# EAGLE board 14138-QwiicHUD-Panel (EAGLE 9.1.0), part 1 of 4
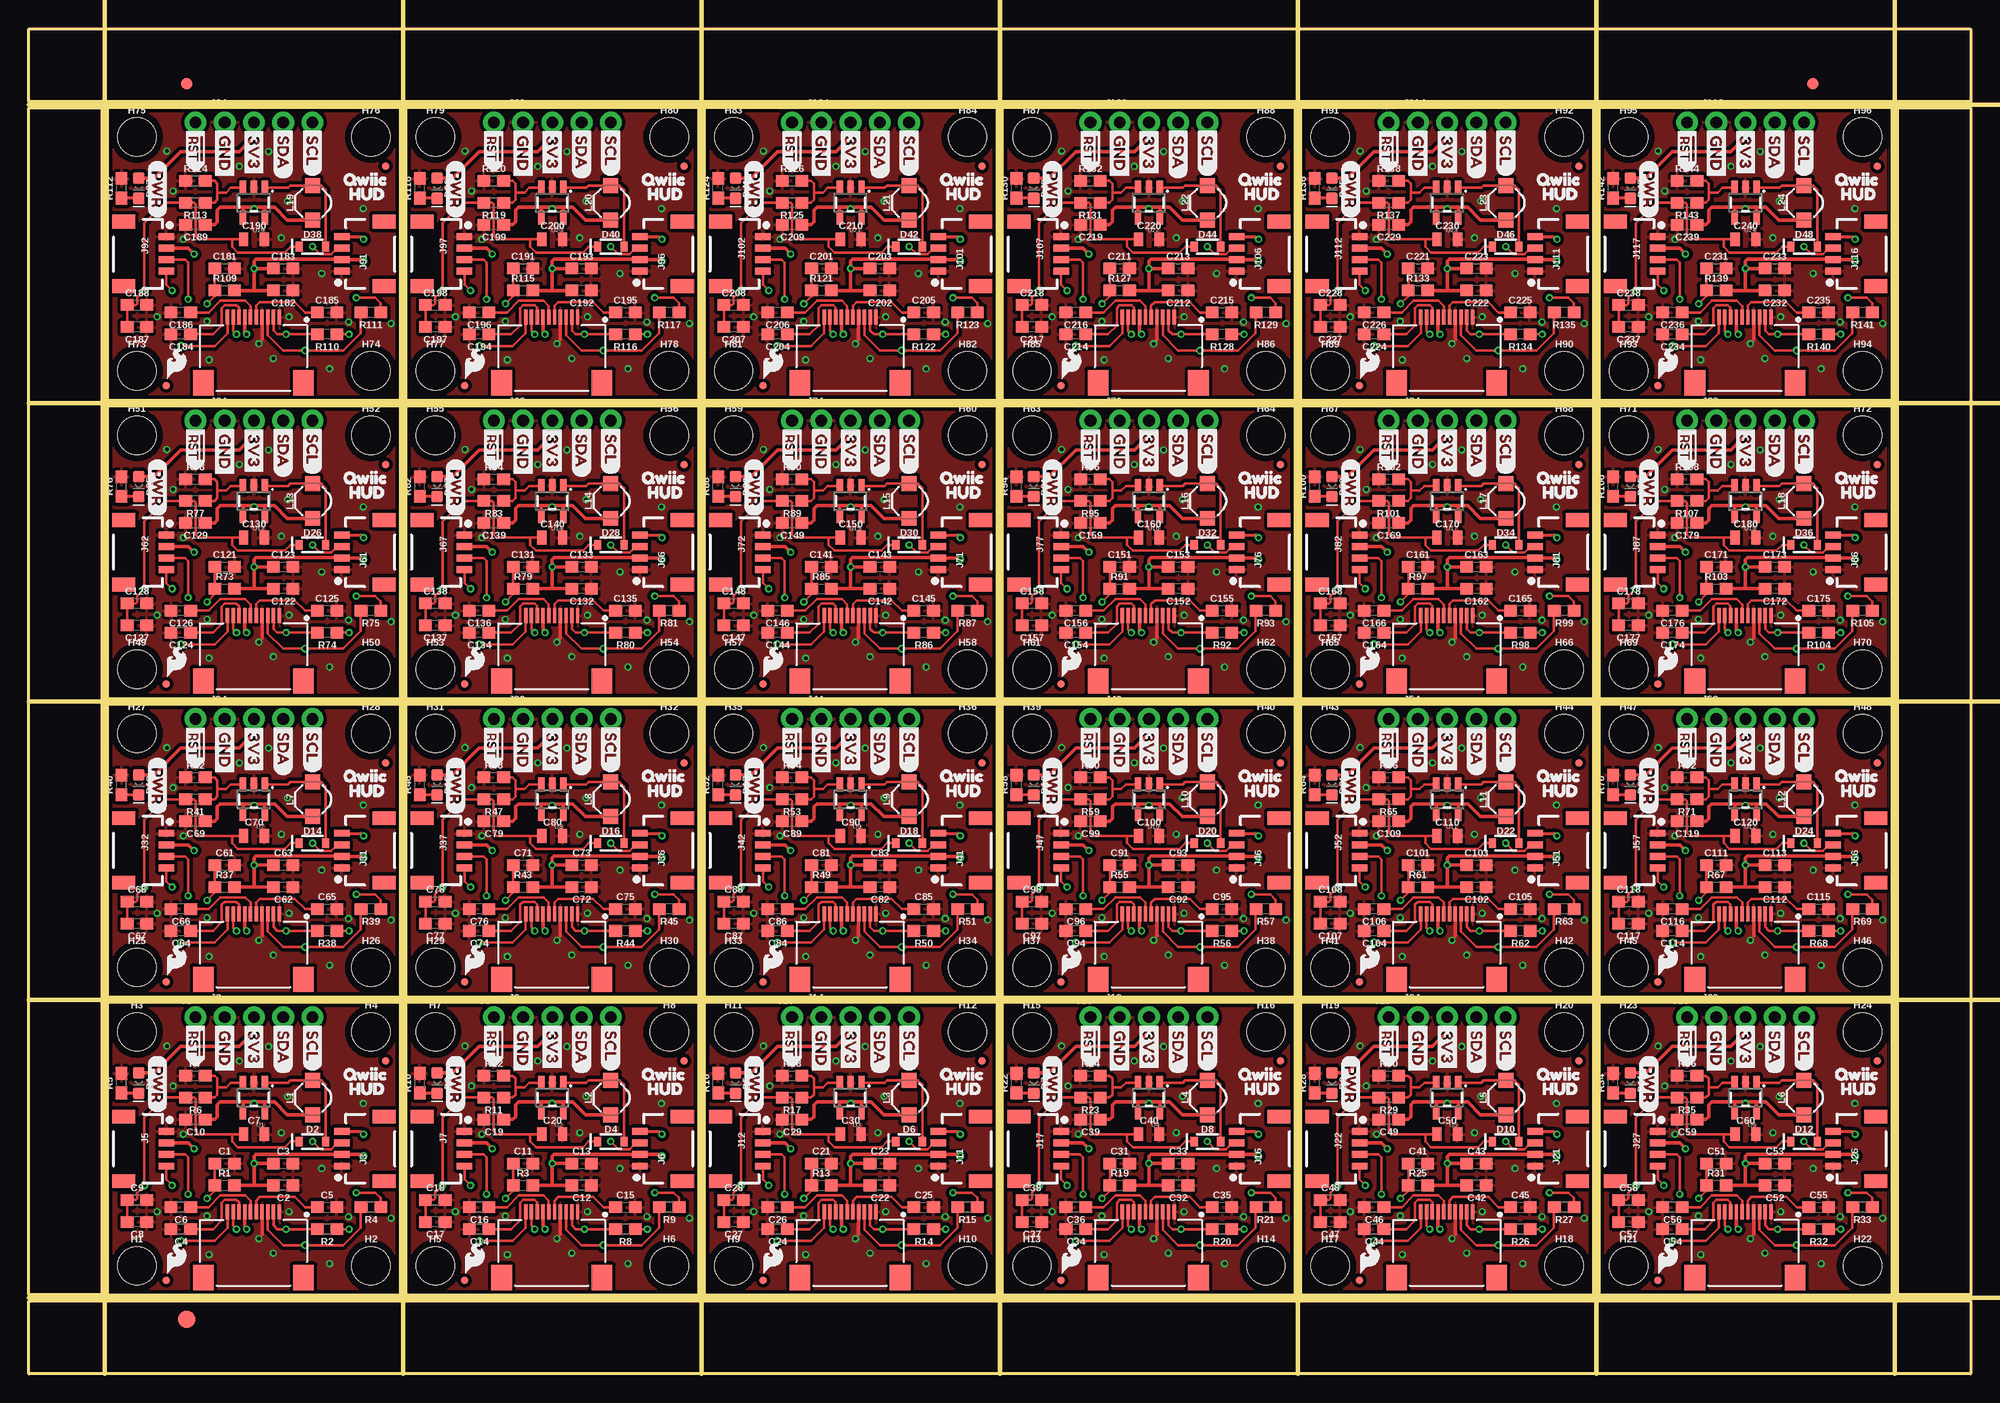
[diagram p0: board, top side]
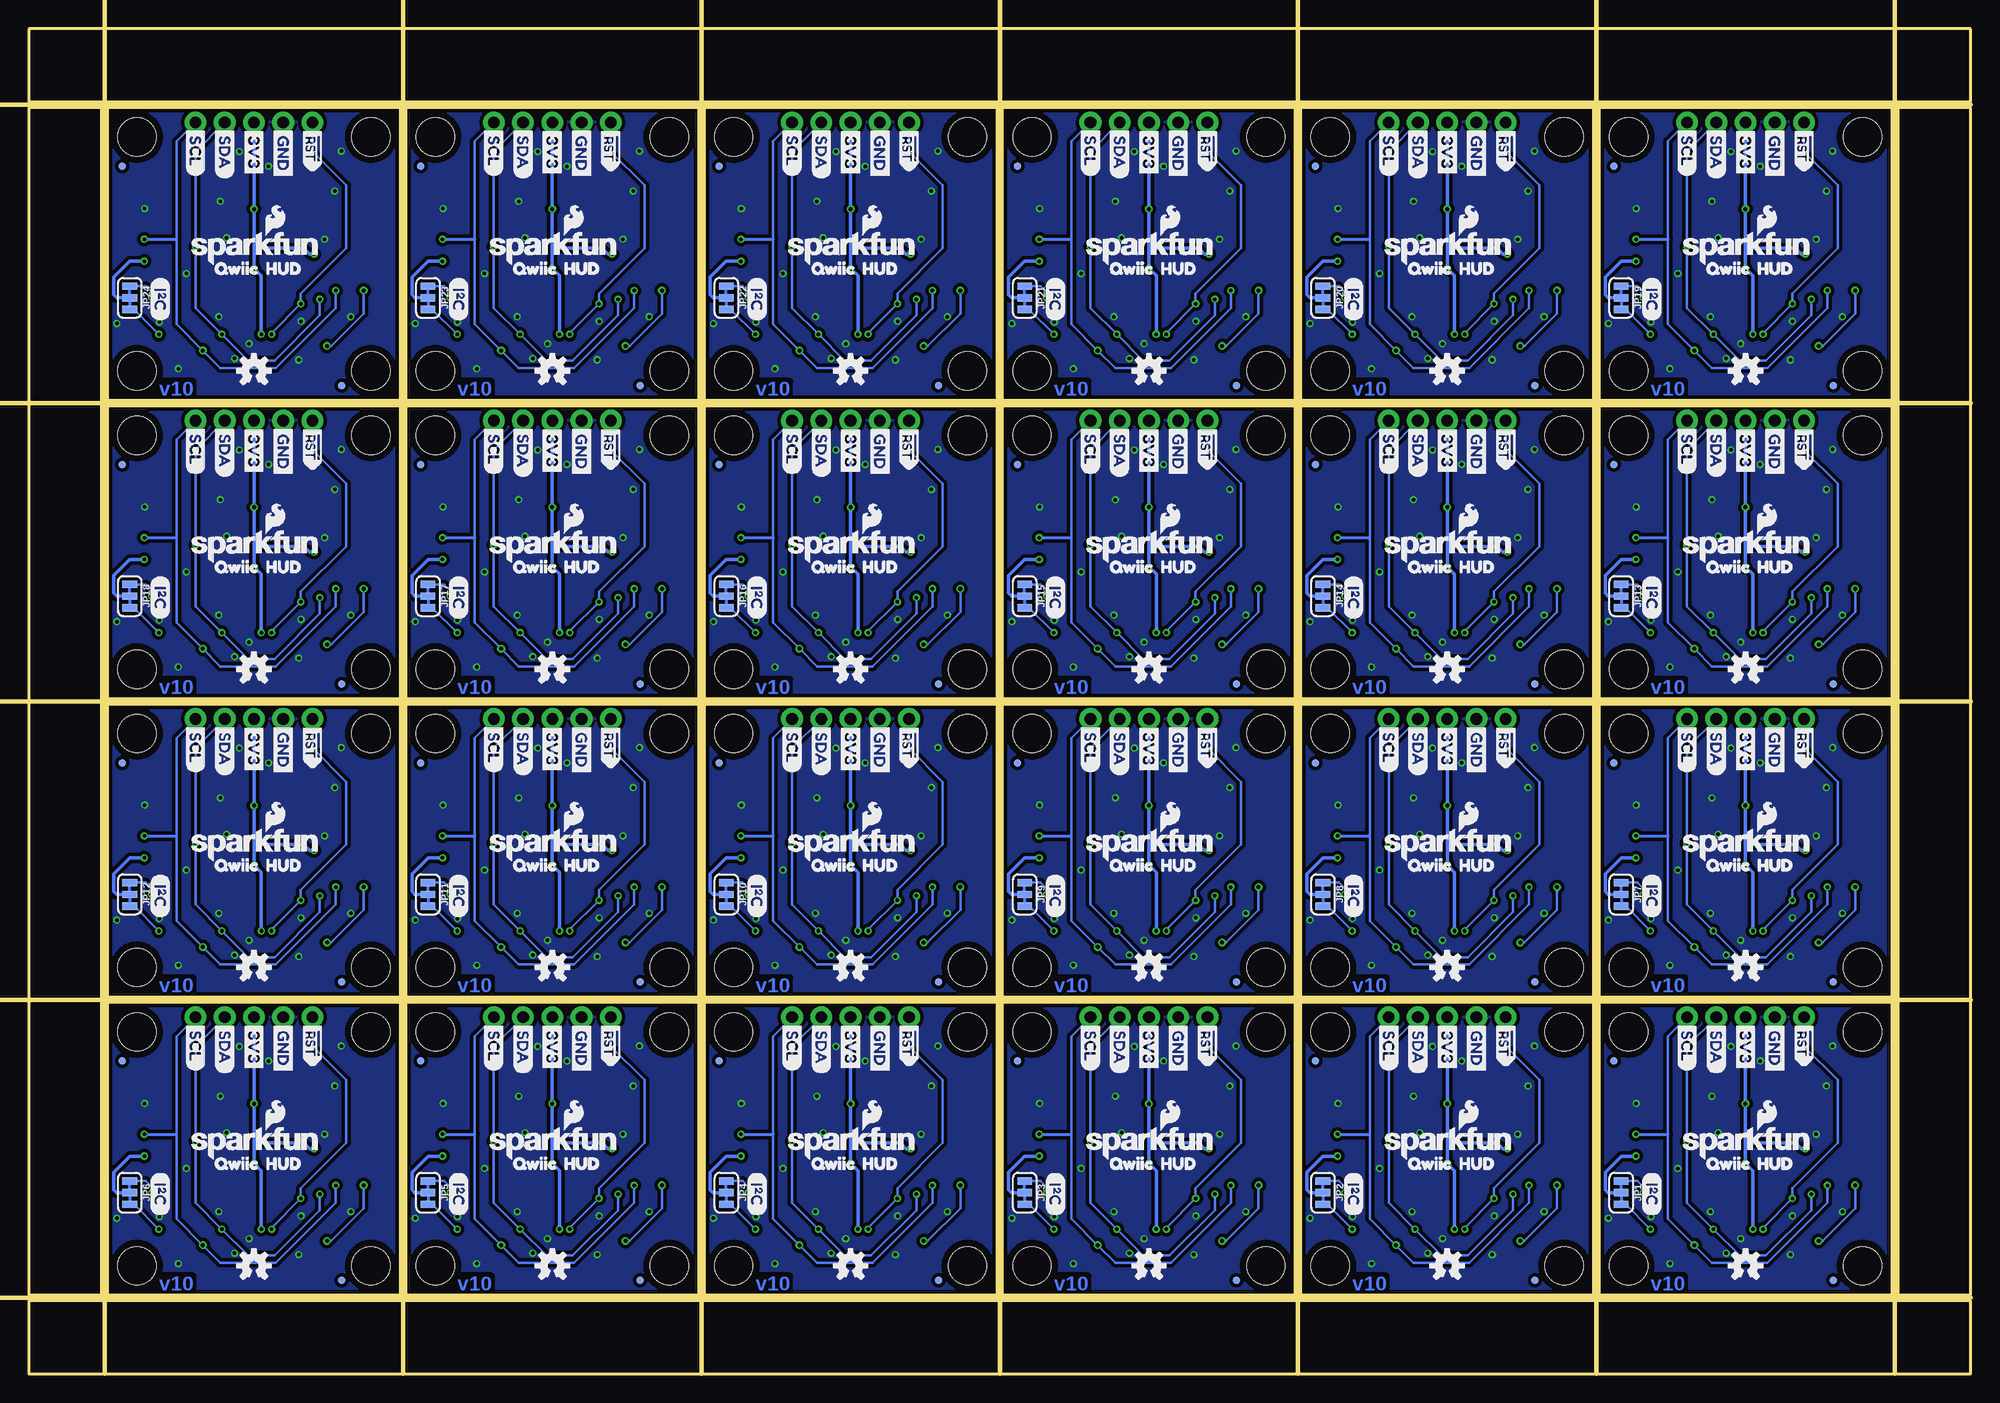
[diagram p1: board, bottom side, seen from below]

Size 168.66 x 116.84 mm. Coordinates in mm from the lower left corner, seen from the top.
Outline: 6.86,32.26 32.26,32.26 32.26,6.86 6.86,6.86 6.86,32.26
Outline: 32.77,32.26 58.17,32.26 58.17,6.86 32.77,6.86 32.77,32.26
Outline: 58.67,32.26 84.07,32.26 84.07,6.86 58.67,6.86 58.67,32.26
Outline: 84.58,32.26 109.98,32.26 109.98,6.86 84.58,6.86 84.58,32.26
Outline: 110.49,32.26 135.89,32.26 135.89,6.86 110.49,6.86 110.49,32.26
Outline: 136.4,32.26 161.8,32.26 161.8,6.86 136.4,6.86 136.4,32.26
Outline: 6.86,58.17 32.26,58.17 32.26,32.77 6.86,32.77 6.86,58.17
Outline: 32.77,58.17 58.17,58.17 58.17,32.77 32.77,32.77 32.77,58.17
Outline: 58.67,58.17 84.07,58.17 84.07,32.77 58.67,32.77 58.67,58.17
Outline: 84.58,58.17 109.98,58.17 109.98,32.77 84.58,32.77 84.58,58.17
Outline: 110.49,58.17 135.89,58.17 135.89,32.77 110.49,32.77 110.49,58.17
Outline: 136.4,58.17 161.8,58.17 161.8,32.77 136.4,32.77 136.4,58.17
Outline: 6.86,84.07 32.26,84.07 32.26,58.67 6.86,58.67 6.86,84.07
Outline: 32.77,84.07 58.17,84.07 58.17,58.67 32.77,58.67 32.77,84.07
Outline: 58.67,84.07 84.07,84.07 84.07,58.67 58.67,58.67 58.67,84.07
Outline: 84.58,84.07 109.98,84.07 109.98,58.67 84.58,58.67 84.58,84.07
Outline: 110.49,84.07 135.89,84.07 135.89,58.67 110.49,58.67 110.49,84.07
Outline: 136.4,84.07 161.8,84.07 161.8,58.67 136.4,58.67 136.4,84.07
Outline: 6.86,109.98 32.26,109.98 32.26,84.58 6.86,84.58 6.86,109.98
Outline: 32.77,109.98 58.17,109.98 58.17,84.58 32.77,84.58 32.77,109.98
Outline: 58.67,109.98 84.07,109.98 84.07,84.58 58.67,84.58 58.67,109.98
Outline: 84.58,109.98 109.98,109.98 109.98,84.58 84.58,84.58 84.58,109.98
Outline: 110.49,109.98 135.89,109.98 135.89,84.58 110.49,84.58 110.49,109.98
Outline: 136.4,109.98 161.8,109.98 161.8,84.58 136.4,84.58 136.4,109.98
Outline: 0,6.35 168.66,6.35 168.66,0 0,0 0,6.35
Outline: 162.31,109.98 168.66,109.98 168.66,6.86 162.31,6.86 162.31,109.98
Outline: 0,116.84 168.66,116.84 168.66,110.49 0,110.49 0,116.84
Outline: 0,109.98 6.35,109.98 6.35,6.86 0,6.86 0,109.98
Copper layers (1*16): Top 0.035mm / dielectric 1.5mm / Bottom 0.035mm
Design rules "SparkFun-2-layer-PCBWay-LIMIT": minimum track width 6mil, minimum drill 0.3mm, track to track 6mil, track to pad 6mil, pad to pad 6mil, via to via 6mil, smd to smd 6mil, copper to edge 6mil, drill to drill 6mil, minimum pad ring 6mil, minimum via ring 6mil, stop-mask expansion 4mil, vias tented up to drill 25mil, thermal gap 10mil
Milling: 12 lines

## Footprints (pad centres in the part's own frame; a part is rotated, then mirrored left to right if it is on the bottom)
0603 = smd 1.1 x 1: 1 -0.85,0; 2 0.85,0
0805 = smd 0.8 x 1.2: 1 -0.9,0; 2 0.9,0
LED-0603 = smd 1 x 1: A -0.877,0; C 0.877,0
SOD-323 = smd 0.63 x 0.83: A 1.15,0; C -1.15,0
FIDUCIAL-1X2 = smd 1 x 1: 1 0,0
FIDUCIAL-1.5X3 = smd 1.5 x 1.5: 1 0,0
FIDUCIAL-MICRO = smd 0.635 x 0.635: 1 0,0
STAND-OFF = hole 3.302: 0,0
1X01_NO_SILK = drill 1.016 pad 1.88: 1 0,0
1X04_NO_SILK = drill 1.016 pad 1.88: 1 0,0; 2 2.54,0; 3 5.08,0; 4 7.62,0
1X04_1MM_RA = smd 0.6 x 1.35: 1 -1.5,0; 2 -0.5,0; 3 0.5,0; 4 1.5,0 | smd 1.2 x 2: NC1 2.8,-3.675; NC2 -2.8,-3.675
SERIES6288 = smd 0.3 x 1.3: 1 -2.3,3.4; 2 -1.8,3.4; 3 -1.3,3.4; 4 -0.8,3.4; 5 -0.3,3.4; 6 0.2,3.4; 7 0.7,3.4; 8 1.2,3.4; 9 1.7,3.4; 10 2.2,3.4 | smd 1.8 x 2.2: NC1 -4.4,-2.3; NC2 4.3,-2.3
SMT-JUMPER_3_2-NC_TRACE_SILK = smd 0.635 x 1.27: 1 -1.016,0; 2 0,0; 3 1.016,0
INDUCTOR_4.7UH = smd 1.3 x 1.3: P$1 -1.5,0; P$2 1.5,0
SOT23-5 = smd 0.55 x 1.2: 1 -0.95,-1.3; 2 0,-1.3; 3 0.95,-1.3; 4 0.95,1.3; 5 -0.95,1.3

## Placement (x,y rotation side)
C1  2.2uF  [0603]  17.02,18.29 0 top
C2  4.7uF  [0603]  22.1,16.38 180 top
C3  0.1uF  [0603]  22.1,18.29 0 top
C4  1.0uF  [0603]  13.21,12.57 180 top
C5  1.0uF  [0603]  25.91,14.48 0 top
C6  1.0uF  [0603]  13.21,14.48 180 top
C7  1.0uF  [0805]  19.56,20.83 0 top
C8  4.7uF  [0603]  9.4,13.21 180 top
C9  0.1uF  [0603]  9.4,15.11 0 top
C10  1.0uF  [0603]  14.48,22.1 180 top
C11  2.2uF  [0603]  42.93,18.29 0 top
C12  4.7uF  [0603]  48.01,16.38 180 top
C13  0.1uF  [0603]  48.01,18.29 0 top
C14  1.0uF  [0603]  39.12,12.57 180 top
C15  1.0uF  [0603]  51.82,14.48 0 top
C16  1.0uF  [0603]  39.12,14.48 180 top
C17  4.7uF  [0603]  35.31,13.21 180 top
C18  0.1uF  [0603]  35.31,15.11 0 top
C19  1.0uF  [0603]  40.39,22.1 180 top
C20  1.0uF  [0805]  45.47,20.83 0 top
C21  2.2uF  [0603]  68.83,18.29 0 top
C22  4.7uF  [0603]  73.91,16.38 180 top
C23  0.1uF  [0603]  73.91,18.29 0 top
C24  1.0uF  [0603]  65.02,12.57 180 top
C25  1.0uF  [0603]  77.72,14.48 0 top
C26  1.0uF  [0603]  65.02,14.48 180 top
C27  4.7uF  [0603]  61.21,13.21 180 top
C28  0.1uF  [0603]  61.21,15.11 0 top
C29  1.0uF  [0603]  66.29,22.1 180 top
C30  1.0uF  [0805]  71.37,20.83 0 top
C31  2.2uF  [0603]  94.74,18.29 0 top
C32  4.7uF  [0603]  99.82,16.38 180 top
C33  0.1uF  [0603]  99.82,18.29 0 top
C34  1.0uF  [0603]  90.93,12.57 180 top
C35  1.0uF  [0603]  103.63,14.48 0 top
C36  1.0uF  [0603]  90.93,14.48 180 top
C37  4.7uF  [0603]  87.12,13.21 180 top
C38  0.1uF  [0603]  87.12,15.11 0 top
C39  1.0uF  [0603]  92.2,22.1 180 top
C40  1.0uF  [0805]  97.28,20.83 0 top
C41  2.2uF  [0603]  120.65,18.29 0 top
C42  4.7uF  [0603]  125.73,16.38 180 top
C43  0.1uF  [0603]  125.73,18.29 0 top
C44  1.0uF  [0603]  116.84,12.57 180 top
C45  1.0uF  [0603]  129.54,14.48 0 top
C46  1.0uF  [0603]  116.84,14.48 180 top
C47  4.7uF  [0603]  113.03,13.21 180 top
C48  0.1uF  [0603]  113.03,15.11 0 top
C49  1.0uF  [0603]  118.11,22.1 180 top
C50  1.0uF  [0805]  123.19,20.83 0 top
C51  2.2uF  [0603]  146.56,18.29 0 top
C52  4.7uF  [0603]  151.64,16.38 180 top
C53  0.1uF  [0603]  151.64,18.29 0 top
C54  1.0uF  [0603]  142.75,12.57 180 top
C55  1.0uF  [0603]  155.45,14.48 0 top
C56  1.0uF  [0603]  142.75,14.48 180 top
C57  4.7uF  [0603]  138.94,13.21 180 top
C58  0.1uF  [0603]  138.94,15.11 0 top
C59  1.0uF  [0603]  144.02,22.1 180 top
C60  1.0uF  [0805]  149.1,20.83 0 top
C61  2.2uF  [0603]  17.02,44.2 0 top
C62  4.7uF  [0603]  22.1,42.29 180 top
C63  0.1uF  [0603]  22.1,44.2 0 top
C64  1.0uF  [0603]  13.21,38.48 180 top
C65  1.0uF  [0603]  25.91,40.39 0 top
C66  1.0uF  [0603]  13.21,40.39 180 top
C67  4.7uF  [0603]  9.4,39.12 180 top
C68  0.1uF  [0603]  9.4,41.02 0 top
C69  1.0uF  [0603]  14.48,48.01 180 top
C70  1.0uF  [0805]  19.56,46.74 0 top
C71  2.2uF  [0603]  42.93,44.2 0 top
C72  4.7uF  [0603]  48.01,42.29 180 top
C73  0.1uF  [0603]  48.01,44.2 0 top
C74  1.0uF  [0603]  39.12,38.48 180 top
C75  1.0uF  [0603]  51.82,40.39 0 top
C76  1.0uF  [0603]  39.12,40.39 180 top
C77  4.7uF  [0603]  35.31,39.12 180 top
C78  0.1uF  [0603]  35.31,41.02 0 top
C79  1.0uF  [0603]  40.39,48.01 180 top
C80  1.0uF  [0805]  45.47,46.74 0 top
C81  2.2uF  [0603]  68.83,44.2 0 top
C82  4.7uF  [0603]  73.91,42.29 180 top
C83  0.1uF  [0603]  73.91,44.2 0 top
C84  1.0uF  [0603]  65.02,38.48 180 top
C85  1.0uF  [0603]  77.72,40.39 0 top
C86  1.0uF  [0603]  65.02,40.39 180 top
C87  4.7uF  [0603]  61.21,39.12 180 top
C88  0.1uF  [0603]  61.21,41.02 0 top
C89  1.0uF  [0603]  66.29,48.01 180 top
C90  1.0uF  [0805]  71.37,46.74 0 top
C91  2.2uF  [0603]  94.74,44.2 0 top
C92  4.7uF  [0603]  99.82,42.29 180 top
C93  0.1uF  [0603]  99.82,44.2 0 top
C94  1.0uF  [0603]  90.93,38.48 180 top
C95  1.0uF  [0603]  103.63,40.39 0 top
C96  1.0uF  [0603]  90.93,40.39 180 top
C97  4.7uF  [0603]  87.12,39.12 180 top
C98  0.1uF  [0603]  87.12,41.02 0 top
C99  1.0uF  [0603]  92.2,48.01 180 top
C100  1.0uF  [0805]  97.28,46.74 0 top
C101  2.2uF  [0603]  120.65,44.2 0 top
C102  4.7uF  [0603]  125.73,42.29 180 top
C103  0.1uF  [0603]  125.73,44.2 0 top
C104  1.0uF  [0603]  116.84,38.48 180 top
C105  1.0uF  [0603]  129.54,40.39 0 top
C106  1.0uF  [0603]  116.84,40.39 180 top
C107  4.7uF  [0603]  113.03,39.12 180 top
C108  0.1uF  [0603]  113.03,41.02 0 top
C109  1.0uF  [0603]  118.11,48.01 180 top
C110  1.0uF  [0805]  123.19,46.74 0 top
C111  2.2uF  [0603]  146.56,44.2 0 top
C112  4.7uF  [0603]  151.64,42.29 180 top
C113  0.1uF  [0603]  151.64,44.2 0 top
C114  1.0uF  [0603]  142.75,38.48 180 top
C115  1.0uF  [0603]  155.45,40.39 0 top
C116  1.0uF  [0603]  142.75,40.39 180 top
C117  4.7uF  [0603]  138.94,39.12 180 top
C118  0.1uF  [0603]  138.94,41.02 0 top
C119  1.0uF  [0603]  144.02,48.01 180 top
C120  1.0uF  [0805]  149.1,46.74 0 top
C121  2.2uF  [0603]  17.02,70.1 0 top
C122  4.7uF  [0603]  22.1,68.2 180 top
C123  0.1uF  [0603]  22.1,70.1 0 top
C124  1.0uF  [0603]  13.21,64.39 180 top
C125  1.0uF  [0603]  25.91,66.29 0 top
C126  1.0uF  [0603]  13.21,66.29 180 top
C127  4.7uF  [0603]  9.4,65.02 180 top
C128  0.1uF  [0603]  9.4,66.93 0 top
C129  1.0uF  [0603]  14.48,73.91 180 top
C130  1.0uF  [0805]  19.56,72.64 0 top
C131  2.2uF  [0603]  42.93,70.1 0 top
C132  4.7uF  [0603]  48.01,68.2 180 top
C133  0.1uF  [0603]  48.01,70.1 0 top
C134  1.0uF  [0603]  39.12,64.39 180 top
C135  1.0uF  [0603]  51.82,66.29 0 top
C136  1.0uF  [0603]  39.12,66.29 180 top
C137  4.7uF  [0603]  35.31,65.02 180 top
C138  0.1uF  [0603]  35.31,66.93 0 top
C139  1.0uF  [0603]  40.39,73.91 180 top
C140  1.0uF  [0805]  45.47,72.64 0 top
C141  2.2uF  [0603]  68.83,70.1 0 top
C142  4.7uF  [0603]  73.91,68.2 180 top
C143  0.1uF  [0603]  73.91,70.1 0 top
C144  1.0uF  [0603]  65.02,64.39 180 top
C145  1.0uF  [0603]  77.72,66.29 0 top
C146  1.0uF  [0603]  65.02,66.29 180 top
C147  4.7uF  [0603]  61.21,65.02 180 top
C148  0.1uF  [0603]  61.21,66.93 0 top
C149  1.0uF  [0603]  66.29,73.91 180 top
C150  1.0uF  [0805]  71.37,72.64 0 top
C151  2.2uF  [0603]  94.74,70.1 0 top
C152  4.7uF  [0603]  99.82,68.2 180 top
C153  0.1uF  [0603]  99.82,70.1 0 top
C154  1.0uF  [0603]  90.93,64.39 180 top
C155  1.0uF  [0603]  103.63,66.29 0 top
C156  1.0uF  [0603]  90.93,66.29 180 top
C157  4.7uF  [0603]  87.12,65.02 180 top
C158  0.1uF  [0603]  87.12,66.93 0 top
C159  1.0uF  [0603]  92.2,73.91 180 top
C160  1.0uF  [0805]  97.28,72.64 0 top
C161  2.2uF  [0603]  120.65,70.1 0 top
C162  4.7uF  [0603]  125.73,68.2 180 top
C163  0.1uF  [0603]  125.73,70.1 0 top
C164  1.0uF  [0603]  116.84,64.39 180 top
C165  1.0uF  [0603]  129.54,66.29 0 top
C166  1.0uF  [0603]  116.84,66.29 180 top
C167  4.7uF  [0603]  113.03,65.02 180 top
C168  0.1uF  [0603]  113.03,66.93 0 top
C169  1.0uF  [0603]  118.11,73.91 180 top
C170  1.0uF  [0805]  123.19,72.64 0 top
C171  2.2uF  [0603]  146.56,70.1 0 top
C172  4.7uF  [0603]  151.64,68.2 180 top
C173  0.1uF  [0603]  151.64,70.1 0 top
C174  1.0uF  [0603]  142.75,64.39 180 top
C175  1.0uF  [0603]  155.45,66.29 0 top
C176  1.0uF  [0603]  142.75,66.29 180 top
C177  4.7uF  [0603]  138.94,65.02 180 top
C178  0.1uF  [0603]  138.94,66.93 0 top
C179  1.0uF  [0603]  144.02,73.91 180 top
C180  1.0uF  [0805]  149.1,72.64 0 top
C181  2.2uF  [0603]  17.02,96.01 0 top
C182  4.7uF  [0603]  22.1,94.11 180 top
C183  0.1uF  [0603]  22.1,96.01 0 top
C184  1.0uF  [0603]  13.21,90.3 180 top
C185  1.0uF  [0603]  25.91,92.2 0 top
C186  1.0uF  [0603]  13.21,92.2 180 top
C187  4.7uF  [0603]  9.4,90.93 180 top
C188  0.1uF  [0603]  9.4,92.84 0 top
C189  1.0uF  [0603]  14.48,99.82 180 top
C190  1.0uF  [0805]  19.56,98.55 0 top
C191  2.2uF  [0603]  42.93,96.01 0 top
C192  4.7uF  [0603]  48.01,94.11 180 top
C193  0.1uF  [0603]  48.01,96.01 0 top
C194  1.0uF  [0603]  39.12,90.3 180 top
C195  1.0uF  [0603]  51.82,92.2 0 top
C196  1.0uF  [0603]  39.12,92.2 180 top
C197  4.7uF  [0603]  35.31,90.93 180 top
C198  0.1uF  [0603]  35.31,92.84 0 top
C199  1.0uF  [0603]  40.39,99.82 180 top
C200  1.0uF  [0805]  45.47,98.55 0 top
C201  2.2uF  [0603]  68.83,96.01 0 top
C202  4.7uF  [0603]  73.91,94.11 180 top
C203  0.1uF  [0603]  73.91,96.01 0 top
C204  1.0uF  [0603]  65.02,90.3 180 top
C205  1.0uF  [0603]  77.72,92.2 0 top
C206  1.0uF  [0603]  65.02,92.2 180 top
C207  4.7uF  [0603]  61.21,90.93 180 top
C208  0.1uF  [0603]  61.21,92.84 0 top
C209  1.0uF  [0603]  66.29,99.82 180 top
C210  1.0uF  [0805]  71.37,98.55 0 top
C211  2.2uF  [0603]  94.74,96.01 0 top
C212  4.7uF  [0603]  99.82,94.11 180 top
C213  0.1uF  [0603]  99.82,96.01 0 top
C214  1.0uF  [0603]  90.93,90.3 180 top
C215  1.0uF  [0603]  103.63,92.2 0 top
C216  1.0uF  [0603]  90.93,92.2 180 top
C217  4.7uF  [0603]  87.12,90.93 180 top
C218  0.1uF  [0603]  87.12,92.84 0 top
C219  1.0uF  [0603]  92.2,99.82 180 top
C220  1.0uF  [0805]  97.28,98.55 0 top
C221  2.2uF  [0603]  120.65,96.01 0 top
C222  4.7uF  [0603]  125.73,94.11 180 top
C223  0.1uF  [0603]  125.73,96.01 0 top
C224  1.0uF  [0603]  116.84,90.3 180 top
C225  1.0uF  [0603]  129.54,92.2 0 top
C226  1.0uF  [0603]  116.84,92.2 180 top
C227  4.7uF  [0603]  113.03,90.93 180 top
C228  0.1uF  [0603]  113.03,92.84 0 top
C229  1.0uF  [0603]  118.11,99.82 180 top
C230  1.0uF  [0805]  123.19,98.55 0 top
C231  2.2uF  [0603]  146.56,96.01 0 top
C232  4.7uF  [0603]  151.64,94.11 180 top
C233  0.1uF  [0603]  151.64,96.01 0 top
C234  1.0uF  [0603]  142.75,90.3 180 top
C235  1.0uF  [0603]  155.45,92.2 0 top
C236  1.0uF  [0603]  142.75,92.2 180 top
C237  4.7uF  [0603]  138.94,90.93 180 top
C238  0.1uF  [0603]  138.94,92.84 0 top
C239  1.0uF  [0603]  144.02,99.82 180 top
C240  1.0uF  [0805]  149.1,98.55 0 top
D1  RED  [LED-0603]  9.56,25.26 270 top
D2  1A/23V/620mV  [SOD-323]  24.64,20.19 0 top
D3  RED  [LED-0603]  35.47,25.26 270 top
D4  1A/23V/620mV  [SOD-323]  50.55,20.19 0 top
D5  RED  [LED-0603]  61.37,25.26 270 top
D6  1A/23V/620mV  [SOD-323]  76.45,20.19 0 top
D7  RED  [LED-0603]  87.28,25.26 270 top
D8  1A/23V/620mV  [SOD-323]  102.36,20.19 0 top
D9  RED  [LED-0603]  113.19,25.26 270 top
D10  1A/23V/620mV  [SOD-323]  128.27,20.19 0 top
D11  RED  [LED-0603]  139.1,25.26 270 top
D12  1A/23V/620mV  [SOD-323]  154.18,20.19 0 top
D13  RED  [LED-0603]  9.56,51.17 270 top
D14  1A/23V/620mV  [SOD-323]  24.64,46.1 0 top
D15  RED  [LED-0603]  35.47,51.17 270 top
D16  1A/23V/620mV  [SOD-323]  50.55,46.1 0 top
D17  RED  [LED-0603]  61.37,51.17 270 top
D18  1A/23V/620mV  [SOD-323]  76.45,46.1 0 top
D19  RED  [LED-0603]  87.28,51.17 270 top
D20  1A/23V/620mV  [SOD-323]  102.36,46.1 0 top
D21  RED  [LED-0603]  113.19,51.17 270 top
D22  1A/23V/620mV  [SOD-323]  128.27,46.1 0 top
D23  RED  [LED-0603]  139.1,51.17 270 top
D24  1A/23V/620mV  [SOD-323]  154.18,46.1 0 top
D25  RED  [LED-0603]  9.56,77.07 270 top
D26  1A/23V/620mV  [SOD-323]  24.64,72.01 0 top
D27  RED  [LED-0603]  35.47,77.07 270 top
D28  1A/23V/620mV  [SOD-323]  50.55,72.01 0 top
D29  RED  [LED-0603]  61.37,77.07 270 top
D30  1A/23V/620mV  [SOD-323]  76.45,72.01 0 top
D31  RED  [LED-0603]  87.28,77.07 270 top
D32  1A/23V/620mV  [SOD-323]  102.36,72.01 0 top
D33  RED  [LED-0603]  113.19,77.07 270 top
D34  1A/23V/620mV  [SOD-323]  128.27,72.01 0 top
D35  RED  [LED-0603]  139.1,77.07 270 top
D36  1A/23V/620mV  [SOD-323]  154.18,72.01 0 top
D37  RED  [LED-0603]  9.56,102.98 270 top
D38  1A/23V/620mV  [SOD-323]  24.64,97.92 0 top
D39  RED  [LED-0603]  35.47,102.98 270 top
D40  1A/23V/620mV  [SOD-323]  50.55,97.92 0 top
D41  RED  [LED-0603]  61.37,102.98 270 top
D42  1A/23V/620mV  [SOD-323]  76.45,97.92 0 top
D43  RED  [LED-0603]  87.28,102.98 270 top
D44  1A/23V/620mV  [SOD-323]  102.36,97.92 0 top
D45  RED  [LED-0603]  113.19,102.98 270 top
D46  1A/23V/620mV  [SOD-323]  128.27,97.92 0 top
D47  RED  [LED-0603]  139.1,102.98 270 top
D48  1A/23V/620mV  [SOD-323]  154.18,97.92 0 top
E$1  [FIDUCIAL-1X2]  13.72,112.08 0 top
E$2  [FIDUCIAL-1X2]  154.94,112.08 0 top
E$3  [FIDUCIAL-1.5X3]  13.72,4.76 0 top
FD1  FIDUCIALUFIDUCIAL  [FIDUCIAL-MICRO]  11.94,8.13 0 top
FD2  FIDUCIALUFIDUCIAL  [FIDUCIAL-MICRO]  30.99,27.18 0 top
FD3  FIDUCIALUFIDUCIAL  [FIDUCIAL-MICRO]  11.94,8.13 0 bottom
FD4  FIDUCIALUFIDUCIAL  [FIDUCIAL-MICRO]  30.99,27.18 0 bottom
FD5  FIDUCIALUFIDUCIAL  [FIDUCIAL-MICRO]  37.85,8.13 0 top
FD6  FIDUCIALUFIDUCIAL  [FIDUCIAL-MICRO]  56.9,27.18 0 top
FD7  FIDUCIALUFIDUCIAL  [FIDUCIAL-MICRO]  37.85,8.13 0 bottom
FD8  FIDUCIALUFIDUCIAL  [FIDUCIAL-MICRO]  56.9,27.18 0 bottom
FD9  FIDUCIALUFIDUCIAL  [FIDUCIAL-MICRO]  63.75,8.13 0 top
FD10  FIDUCIALUFIDUCIAL  [FIDUCIAL-MICRO]  82.8,27.18 0 top
FD11  FIDUCIALUFIDUCIAL  [FIDUCIAL-MICRO]  63.75,8.13 0 bottom
FD12  FIDUCIALUFIDUCIAL  [FIDUCIAL-MICRO]  82.8,27.18 0 bottom
FD13  FIDUCIALUFIDUCIAL  [FIDUCIAL-MICRO]  89.66,8.13 0 top
FD14  FIDUCIALUFIDUCIAL  [FIDUCIAL-MICRO]  108.71,27.18 0 top
FD15  FIDUCIALUFIDUCIAL  [FIDUCIAL-MICRO]  89.66,8.13 0 bottom
FD16  FIDUCIALUFIDUCIAL  [FIDUCIAL-MICRO]  108.71,27.18 0 bottom
FD17  FIDUCIALUFIDUCIAL  [FIDUCIAL-MICRO]  115.57,8.13 0 top
FD18  FIDUCIALUFIDUCIAL  [FIDUCIAL-MICRO]  134.62,27.18 0 top
FD19  FIDUCIALUFIDUCIAL  [FIDUCIAL-MICRO]  115.57,8.13 0 bottom
FD20  FIDUCIALUFIDUCIAL  [FIDUCIAL-MICRO]  134.62,27.18 0 bottom
FD21  FIDUCIALUFIDUCIAL  [FIDUCIAL-MICRO]  141.48,8.13 0 top
FD22  FIDUCIALUFIDUCIAL  [FIDUCIAL-MICRO]  160.53,27.18 0 top
FD23  FIDUCIALUFIDUCIAL  [FIDUCIAL-MICRO]  141.48,8.13 0 bottom
FD24  FIDUCIALUFIDUCIAL  [FIDUCIAL-MICRO]  160.53,27.18 0 bottom
FD25  FIDUCIALUFIDUCIAL  [FIDUCIAL-MICRO]  11.94,34.04 0 top
FD26  FIDUCIALUFIDUCIAL  [FIDUCIAL-MICRO]  30.99,53.09 0 top
FD27  FIDUCIALUFIDUCIAL  [FIDUCIAL-MICRO]  11.94,34.04 0 bottom
FD28  FIDUCIALUFIDUCIAL  [FIDUCIAL-MICRO]  30.99,53.09 0 bottom
FD29  FIDUCIALUFIDUCIAL  [FIDUCIAL-MICRO]  37.85,34.04 0 top
FD30  FIDUCIALUFIDUCIAL  [FIDUCIAL-MICRO]  56.9,53.09 0 top
FD31  FIDUCIALUFIDUCIAL  [FIDUCIAL-MICRO]  37.85,34.04 0 bottom
FD32  FIDUCIALUFIDUCIAL  [FIDUCIAL-MICRO]  56.9,53.09 0 bottom
FD33  FIDUCIALUFIDUCIAL  [FIDUCIAL-MICRO]  63.75,34.04 0 top
FD34  FIDUCIALUFIDUCIAL  [FIDUCIAL-MICRO]  82.8,53.09 0 top
FD35  FIDUCIALUFIDUCIAL  [FIDUCIAL-MICRO]  63.75,34.04 0 bottom
FD36  FIDUCIALUFIDUCIAL  [FIDUCIAL-MICRO]  82.8,53.09 0 bottom
FD37  FIDUCIALUFIDUCIAL  [FIDUCIAL-MICRO]  89.66,34.04 0 top
FD38  FIDUCIALUFIDUCIAL  [FIDUCIAL-MICRO]  108.71,53.09 0 top
FD39  FIDUCIALUFIDUCIAL  [FIDUCIAL-MICRO]  89.66,34.04 0 bottom
FD40  FIDUCIALUFIDUCIAL  [FIDUCIAL-MICRO]  108.71,53.09 0 bottom
FD41  FIDUCIALUFIDUCIAL  [FIDUCIAL-MICRO]  115.57,34.04 0 top
FD42  FIDUCIALUFIDUCIAL  [FIDUCIAL-MICRO]  134.62,53.09 0 top
FD43  FIDUCIALUFIDUCIAL  [FIDUCIAL-MICRO]  115.57,34.04 0 bottom
FD44  FIDUCIALUFIDUCIAL  [FIDUCIAL-MICRO]  134.62,53.09 0 bottom
FD45  FIDUCIALUFIDUCIAL  [FIDUCIAL-MICRO]  141.48,34.04 0 top
FD46  FIDUCIALUFIDUCIAL  [FIDUCIAL-MICRO]  160.53,53.09 0 top
FD47  FIDUCIALUFIDUCIAL  [FIDUCIAL-MICRO]  141.48,34.04 0 bottom
FD48  FIDUCIALUFIDUCIAL  [FIDUCIAL-MICRO]  160.53,53.09 0 bottom
FD49  FIDUCIALUFIDUCIAL  [FIDUCIAL-MICRO]  11.94,59.94 0 top
FD50  FIDUCIALUFIDUCIAL  [FIDUCIAL-MICRO]  30.99,78.99 0 top
FD51  FIDUCIALUFIDUCIAL  [FIDUCIAL-MICRO]  11.94,59.94 0 bottom
FD52  FIDUCIALUFIDUCIAL  [FIDUCIAL-MICRO]  30.99,78.99 0 bottom
FD53  FIDUCIALUFIDUCIAL  [FIDUCIAL-MICRO]  37.85,59.94 0 top
FD54  FIDUCIALUFIDUCIAL  [FIDUCIAL-MICRO]  56.9,78.99 0 top
FD55  FIDUCIALUFIDUCIAL  [FIDUCIAL-MICRO]  37.85,59.94 0 bottom
FD56  FIDUCIALUFIDUCIAL  [FIDUCIAL-MICRO]  56.9,78.99 0 bottom
FD57  FIDUCIALUFIDUCIAL  [FIDUCIAL-MICRO]  63.75,59.94 0 top
FD58  FIDUCIALUFIDUCIAL  [FIDUCIAL-MICRO]  82.8,78.99 0 top
FD59  FIDUCIALUFIDUCIAL  [FIDUCIAL-MICRO]  63.75,59.94 0 bottom
FD60  FIDUCIALUFIDUCIAL  [FIDUCIAL-MICRO]  82.8,78.99 0 bottom
FD61  FIDUCIALUFIDUCIAL  [FIDUCIAL-MICRO]  89.66,59.94 0 top
FD62  FIDUCIALUFIDUCIAL  [FIDUCIAL-MICRO]  108.71,78.99 0 top
FD63  FIDUCIALUFIDUCIAL  [FIDUCIAL-MICRO]  89.66,59.94 0 bottom
FD64  FIDUCIALUFIDUCIAL  [FIDUCIAL-MICRO]  108.71,78.99 0 bottom
FD65  FIDUCIALUFIDUCIAL  [FIDUCIAL-MICRO]  115.57,59.94 0 top
FD66  FIDUCIALUFIDUCIAL  [FIDUCIAL-MICRO]  134.62,78.99 0 top
FD67  FIDUCIALUFIDUCIAL  [FIDUCIAL-MICRO]  115.57,59.94 0 bottom
FD68  FIDUCIALUFIDUCIAL  [FIDUCIAL-MICRO]  134.62,78.99 0 bottom
FD69  FIDUCIALUFIDUCIAL  [FIDUCIAL-MICRO]  141.48,59.94 0 top
FD70  FIDUCIALUFIDUCIAL  [FIDUCIAL-MICRO]  160.53,78.99 0 top
FD71  FIDUCIALUFIDUCIAL  [FIDUCIAL-MICRO]  141.48,59.94 0 bottom
FD72  FIDUCIALUFIDUCIAL  [FIDUCIAL-MICRO]  160.53,78.99 0 bottom
FD73  FIDUCIALUFIDUCIAL  [FIDUCIAL-MICRO]  11.94,85.85 0 top
FD74  FIDUCIALUFIDUCIAL  [FIDUCIAL-MICRO]  30.99,104.9 0 top
FD75  FIDUCIALUFIDUCIAL  [FIDUCIAL-MICRO]  11.94,85.85 0 bottom
FD76  FIDUCIALUFIDUCIAL  [FIDUCIAL-MICRO]  30.99,104.9 0 bottom
FD77  FIDUCIALUFIDUCIAL  [FIDUCIAL-MICRO]  37.85,85.85 0 top
FD78  FIDUCIALUFIDUCIAL  [FIDUCIAL-MICRO]  56.9,104.9 0 top
FD79  FIDUCIALUFIDUCIAL  [FIDUCIAL-MICRO]  37.85,85.85 0 bottom
FD80  FIDUCIALUFIDUCIAL  [FIDUCIAL-MICRO]  56.9,104.9 0 bottom
FD81  FIDUCIALUFIDUCIAL  [FIDUCIAL-MICRO]  63.75,85.85 0 top
FD82  FIDUCIALUFIDUCIAL  [FIDUCIAL-MICRO]  82.8,104.9 0 top
FD83  FIDUCIALUFIDUCIAL  [FIDUCIAL-MICRO]  63.75,85.85 0 bottom
FD84  FIDUCIALUFIDUCIAL  [FIDUCIAL-MICRO]  82.8,104.9 0 bottom
FD85  FIDUCIALUFIDUCIAL  [FIDUCIAL-MICRO]  89.66,85.85 0 top
FD86  FIDUCIALUFIDUCIAL  [FIDUCIAL-MICRO]  108.71,104.9 0 top
FD87  FIDUCIALUFIDUCIAL  [FIDUCIAL-MICRO]  89.66,85.85 0 bottom
FD88  FIDUCIALUFIDUCIAL  [FIDUCIAL-MICRO]  108.71,104.9 0 bottom
FD89  FIDUCIALUFIDUCIAL  [FIDUCIAL-MICRO]  115.57,85.85 0 top
FD90  FIDUCIALUFIDUCIAL  [FIDUCIAL-MICRO]  134.62,104.9 0 top
FD91  FIDUCIALUFIDUCIAL  [FIDUCIAL-MICRO]  115.57,85.85 0 bottom
FD92  FIDUCIALUFIDUCIAL  [FIDUCIAL-MICRO]  134.62,104.9 0 bottom
FD93  FIDUCIALUFIDUCIAL  [FIDUCIAL-MICRO]  141.48,85.85 0 top
FD94  FIDUCIALUFIDUCIAL  [FIDUCIAL-MICRO]  160.53,104.9 0 top
FD95  FIDUCIALUFIDUCIAL  [FIDUCIAL-MICRO]  141.48,85.85 0 bottom
FD96  FIDUCIALUFIDUCIAL  [FIDUCIAL-MICRO]  160.53,104.9 0 bottom
H1  STAND-OFF  [STAND-OFF]  9.4,9.4 0 top
H2  STAND-OFF  [STAND-OFF]  29.72,9.4 0 top
H3  STAND-OFF  [STAND-OFF]  9.4,29.72 0 top
H4  STAND-OFF  [STAND-OFF]  29.72,29.72 0 top
H5  STAND-OFF  [STAND-OFF]  35.31,9.4 0 top
H6  STAND-OFF  [STAND-OFF]  55.63,9.4 0 top
H7  STAND-OFF  [STAND-OFF]  35.31,29.72 0 top
H8  STAND-OFF  [STAND-OFF]  55.63,29.72 0 top
H9  STAND-OFF  [STAND-OFF]  61.21,9.4 0 top
H10  STAND-OFF  [STAND-OFF]  81.53,9.4 0 top
H11  STAND-OFF  [STAND-OFF]  61.21,29.72 0 top
H12  STAND-OFF  [STAND-OFF]  81.53,29.72 0 top
H13  STAND-OFF  [STAND-OFF]  87.12,9.4 0 top
H14  STAND-OFF  [STAND-OFF]  107.44,9.4 0 top
H15  STAND-OFF  [STAND-OFF]  87.12,29.72 0 top
H16  STAND-OFF  [STAND-OFF]  107.44,29.72 0 top
H17  STAND-OFF  [STAND-OFF]  113.03,9.4 0 top
H18  STAND-OFF  [STAND-OFF]  133.35,9.4 0 top
H19  STAND-OFF  [STAND-OFF]  113.03,29.72 0 top
H20  STAND-OFF  [STAND-OFF]  133.35,29.72 0 top
H21  STAND-OFF  [STAND-OFF]  138.94,9.4 0 top
H22  STAND-OFF  [STAND-OFF]  159.26,9.4 0 top
H23  STAND-OFF  [STAND-OFF]  138.94,29.72 0 top
H24  STAND-OFF  [STAND-OFF]  159.26,29.72 0 top
H25  STAND-OFF  [STAND-OFF]  9.4,35.31 0 top
H26  STAND-OFF  [STAND-OFF]  29.72,35.31 0 top
H27  STAND-OFF  [STAND-OFF]  9.4,55.63 0 top
H28  STAND-OFF  [STAND-OFF]  29.72,55.63 0 top
H29  STAND-OFF  [STAND-OFF]  35.31,35.31 0 top
H30  STAND-OFF  [STAND-OFF]  55.63,35.31 0 top
H31  STAND-OFF  [STAND-OFF]  35.31,55.63 0 top
H32  STAND-OFF  [STAND-OFF]  55.63,55.63 0 top
H33  STAND-OFF  [STAND-OFF]  61.21,35.31 0 top
H34  STAND-OFF  [STAND-OFF]  81.53,35.31 0 top
H35  STAND-OFF  [STAND-OFF]  61.21,55.63 0 top
H36  STAND-OFF  [STAND-OFF]  81.53,55.63 0 top
H37  STAND-OFF  [STAND-OFF]  87.12,35.31 0 top
H38  STAND-OFF  [STAND-OFF]  107.44,35.31 0 top
H39  STAND-OFF  [STAND-OFF]  87.12,55.63 0 top
H40  STAND-OFF  [STAND-OFF]  107.44,55.63 0 top
H41  STAND-OFF  [STAND-OFF]  113.03,35.31 0 top
H42  STAND-OFF  [STAND-OFF]  133.35,35.31 0 top
H43  STAND-OFF  [STAND-OFF]  113.03,55.63 0 top
H44  STAND-OFF  [STAND-OFF]  133.35,55.63 0 top
H45  STAND-OFF  [STAND-OFF]  138.94,35.31 0 top
H46  STAND-OFF  [STAND-OFF]  159.26,35.31 0 top
H47  STAND-OFF  [STAND-OFF]  138.94,55.63 0 top
H48  STAND-OFF  [STAND-OFF]  159.26,55.63 0 top
H49  STAND-OFF  [STAND-OFF]  9.4,61.21 0 top
H50  STAND-OFF  [STAND-OFF]  29.72,61.21 0 top
H51  STAND-OFF  [STAND-OFF]  9.4,81.53 0 top
H52  STAND-OFF  [STAND-OFF]  29.72,81.53 0 top
H53  STAND-OFF  [STAND-OFF]  35.31,61.21 0 top
H54  STAND-OFF  [STAND-OFF]  55.63,61.21 0 top
H55  STAND-OFF  [STAND-OFF]  35.31,81.53 0 top
H56  STAND-OFF  [STAND-OFF]  55.63,81.53 0 top
H57  STAND-OFF  [STAND-OFF]  61.21,61.21 0 top
H58  STAND-OFF  [STAND-OFF]  81.53,61.21 0 top
H59  STAND-OFF  [STAND-OFF]  61.21,81.53 0 top
H60  STAND-OFF  [STAND-OFF]  81.53,81.53 0 top
H61  STAND-OFF  [STAND-OFF]  87.12,61.21 0 top
H62  STAND-OFF  [STAND-OFF]  107.44,61.21 0 top
H63  STAND-OFF  [STAND-OFF]  87.12,81.53 0 top
H64  STAND-OFF  [STAND-OFF]  107.44,81.53 0 top
H65  STAND-OFF  [STAND-OFF]  113.03,61.21 0 top
H66  STAND-OFF  [STAND-OFF]  133.35,61.21 0 top
H67  STAND-OFF  [STAND-OFF]  113.03,81.53 0 top
H68  STAND-OFF  [STAND-OFF]  133.35,81.53 0 top
H69  STAND-OFF  [STAND-OFF]  138.94,61.21 0 top
H70  STAND-OFF  [STAND-OFF]  159.26,61.21 0 top
H71  STAND-OFF  [STAND-OFF]  138.94,81.53 0 top
H72  STAND-OFF  [STAND-OFF]  159.26,81.53 0 top
H73  STAND-OFF  [STAND-OFF]  9.4,87.12 0 top
H74  STAND-OFF  [STAND-OFF]  29.72,87.12 0 top
H75  STAND-OFF  [STAND-OFF]  9.4,107.44 0 top
H76  STAND-OFF  [STAND-OFF]  29.72,107.44 0 top
H77  STAND-OFF  [STAND-OFF]  35.31,87.12 0 top
H78  STAND-OFF  [STAND-OFF]  55.63,87.12 0 top
H79  STAND-OFF  [STAND-OFF]  35.31,107.44 0 top
H80  STAND-OFF  [STAND-OFF]  55.63,107.44 0 top
H81  STAND-OFF  [STAND-OFF]  61.21,87.12 0 top
H82  STAND-OFF  [STAND-OFF]  81.53,87.12 0 top
H83  STAND-OFF  [STAND-OFF]  61.21,107.44 0 top
H84  STAND-OFF  [STAND-OFF]  81.53,107.44 0 top
H85  STAND-OFF  [STAND-OFF]  87.12,87.12 0 top
H86  STAND-OFF  [STAND-OFF]  107.44,87.12 0 top
H87  STAND-OFF  [STAND-OFF]  87.12,107.44 0 top
H88  STAND-OFF  [STAND-OFF]  107.44,107.44 0 top
H89  STAND-OFF  [STAND-OFF]  113.03,87.12 0 top
H90  STAND-OFF  [STAND-OFF]  133.35,87.12 0 top
H91  STAND-OFF  [STAND-OFF]  113.03,107.44 0 top
H92  STAND-OFF  [STAND-OFF]  133.35,107.44 0 top
H93  STAND-OFF  [STAND-OFF]  138.94,87.12 0 top
H94  STAND-OFF  [STAND-OFF]  159.26,87.12 0 top
H95  STAND-OFF  [STAND-OFF]  138.94,107.44 0 top
H96  STAND-OFF  [STAND-OFF]  159.26,107.44 0 top
J1  [1X01_NO_SILK]  14.48,30.99 0 top
J2  [1X04_NO_SILK]  17.02,30.99 0 top
J3  [1X04_1MM_RA]  27.18,19.56 90 top
J4  WISECHIP_HUD_FPC  [SERIES6288]  19.56,10.67 0 top
J5  [1X04_1MM_RA]  11.94,19.56 270 top
J6  [1X04_1MM_RA]  53.09,19.56 90 top
J7  [1X04_1MM_RA]  37.85,19.56 270 top
J8  [1X01_NO_SILK]  40.39,30.99 0 top
J9  [1X04_NO_SILK]  42.93,30.99 0 top
J10  WISECHIP_HUD_FPC  [SERIES6288]  45.47,10.67 0 top
J11  [1X04_1MM_RA]  78.99,19.56 90 top
J12  [1X04_1MM_RA]  63.75,19.56 270 top
J13  [1X01_NO_SILK]  66.29,30.99 0 top
J14  [1X04_NO_SILK]  68.83,30.99 0 top
J15  WISECHIP_HUD_FPC  [SERIES6288]  71.37,10.67 0 top
J16  [1X04_1MM_RA]  104.9,19.56 90 top
J17  [1X04_1MM_RA]  89.66,19.56 270 top
J18  [1X01_NO_SILK]  92.2,30.99 0 top
J19  [1X04_NO_SILK]  94.74,30.99 0 top
J20  WISECHIP_HUD_FPC  [SERIES6288]  97.28,10.67 0 top
J21  [1X04_1MM_RA]  130.81,19.56 90 top
J22  [1X04_1MM_RA]  115.57,19.56 270 top
J23  [1X01_NO_SILK]  118.11,30.99 0 top
J24  [1X04_NO_SILK]  120.65,30.99 0 top
J25  WISECHIP_HUD_FPC  [SERIES6288]  123.19,10.67 0 top
J26  [1X04_1MM_RA]  156.72,19.56 90 top
J27  [1X04_1MM_RA]  141.48,19.56 270 top
J28  [1X01_NO_SILK]  144.02,30.99 0 top
J29  [1X04_NO_SILK]  146.56,30.99 0 top
J30  WISECHIP_HUD_FPC  [SERIES6288]  149.1,10.67 0 top
J31  [1X04_1MM_RA]  27.18,45.47 90 top
J32  [1X04_1MM_RA]  11.94,45.47 270 top
J33  [1X01_NO_SILK]  14.48,56.9 0 top
J34  [1X04_NO_SILK]  17.02,56.9 0 top
J35  WISECHIP_HUD_FPC  [SERIES6288]  19.56,36.58 0 top
J36  [1X04_1MM_RA]  53.09,45.47 90 top
J37  [1X04_1MM_RA]  37.85,45.47 270 top
J38  [1X01_NO_SILK]  40.39,56.9 0 top
J39  [1X04_NO_SILK]  42.93,56.9 0 top
J40  WISECHIP_HUD_FPC  [SERIES6288]  45.47,36.58 0 top
J41  [1X04_1MM_RA]  78.99,45.47 90 top
J42  [1X04_1MM_RA]  63.75,45.47 270 top
J43  [1X01_NO_SILK]  66.29,56.9 0 top
J44  [1X04_NO_SILK]  68.83,56.9 0 top
J45  WISECHIP_HUD_FPC  [SERIES6288]  71.37,36.58 0 top
J46  [1X04_1MM_RA]  104.9,45.47 90 top
J47  [1X04_1MM_RA]  89.66,45.47 270 top
J48  [1X01_NO_SILK]  92.2,56.9 0 top
J49  [1X04_NO_SILK]  94.74,56.9 0 top
J50  WISECHIP_HUD_FPC  [SERIES6288]  97.28,36.58 0 top
J51  [1X04_1MM_RA]  130.81,45.47 90 top
J52  [1X04_1MM_RA]  115.57,45.47 270 top
J53  [1X01_NO_SILK]  118.11,56.9 0 top
J54  [1X04_NO_SILK]  120.65,56.9 0 top
J55  WISECHIP_HUD_FPC  [SERIES6288]  123.19,36.58 0 top
J56  [1X04_1MM_RA]  156.72,45.47 90 top
J57  [1X04_1MM_RA]  141.48,45.47 270 top
J58  [1X01_NO_SILK]  144.02,56.9 0 top
J59  [1X04_NO_SILK]  146.56,56.9 0 top
J60  WISECHIP_HUD_FPC  [SERIES6288]  149.1,36.58 0 top
J61  [1X04_1MM_RA]  27.18,71.37 90 top
J62  [1X04_1MM_RA]  11.94,71.37 270 top
J63  [1X01_NO_SILK]  14.48,82.8 0 top
J64  [1X04_NO_SILK]  17.02,82.8 0 top
J65  WISECHIP_HUD_FPC  [SERIES6288]  19.56,62.48 0 top
J66  [1X04_1MM_RA]  53.09,71.37 90 top
J67  [1X04_1MM_RA]  37.85,71.37 270 top
J68  [1X01_NO_SILK]  40.39,82.8 0 top
J69  [1X04_NO_SILK]  42.93,82.8 0 top
J70  WISECHIP_HUD_FPC  [SERIES6288]  45.47,62.48 0 top
J71  [1X04_1MM_RA]  78.99,71.37 90 top
J72  [1X04_1MM_RA]  63.75,71.37 270 top
J73  [1X01_NO_SILK]  66.29,82.8 0 top
J74  [1X04_NO_SILK]  68.83,82.8 0 top
J75  WISECHIP_HUD_FPC  [SERIES6288]  71.37,62.48 0 top
J76  [1X04_1MM_RA]  104.9,71.37 90 top
J77  [1X04_1MM_RA]  89.66,71.37 270 top
J78  [1X01_NO_SILK]  92.2,82.8 0 top
J79  [1X04_NO_SILK]  94.74,82.8 0 top
J80  WISECHIP_HUD_FPC  [SERIES6288]  97.28,62.48 0 top
J81  [1X04_1MM_RA]  130.81,71.37 90 top
J82  [1X04_1MM_RA]  115.57,71.37 270 top
J83  [1X01_NO_SILK]  118.11,82.8 0 top
J84  [1X04_NO_SILK]  120.65,82.8 0 top
J85  WISECHIP_HUD_FPC  [SERIES6288]  123.19,62.48 0 top
J86  [1X04_1MM_RA]  156.72,71.37 90 top
J87  [1X04_1MM_RA]  141.48,71.37 270 top
J88  [1X01_NO_SILK]  144.02,82.8 0 top
J89  [1X04_NO_SILK]  146.56,82.8 0 top
J90  WISECHIP_HUD_FPC  [SERIES6288]  149.1,62.48 0 top
J91  [1X04_1MM_RA]  27.18,97.28 90 top
J92  [1X04_1MM_RA]  11.94,97.28 270 top
J93  [1X01_NO_SILK]  14.48,108.71 0 top
J94  [1X04_NO_SILK]  17.02,108.71 0 top
J95  WISECHIP_HUD_FPC  [SERIES6288]  19.56,88.39 0 top
J96  [1X04_1MM_RA]  53.09,97.28 90 top
J97  [1X04_1MM_RA]  37.85,97.28 270 top
J98  [1X01_NO_SILK]  40.39,108.71 0 top
J99  [1X04_NO_SILK]  42.93,108.71 0 top
J100  WISECHIP_HUD_FPC  [SERIES6288]  45.47,88.39 0 top
J101  [1X04_1MM_RA]  78.99,97.28 90 top
J102  [1X04_1MM_RA]  63.75,97.28 270 top
J103  [1X01_NO_SILK]  66.29,108.71 0 top
J104  [1X04_NO_SILK]  68.83,108.71 0 top
J105  WISECHIP_HUD_FPC  [SERIES6288]  71.37,88.39 0 top
J106  [1X04_1MM_RA]  104.9,97.28 90 top
J107  [1X04_1MM_RA]  89.66,97.28 270 top
J108  [1X01_NO_SILK]  92.2,108.71 0 top
J109  [1X04_NO_SILK]  94.74,108.71 0 top
J110  WISECHIP_HUD_FPC  [SERIES6288]  97.28,88.39 0 top
J111  [1X04_1MM_RA]  130.81,97.28 90 top
J112  [1X04_1MM_RA]  115.57,97.28 270 top
J113  [1X01_NO_SILK]  118.11,108.71 0 top
J114  [1X04_NO_SILK]  120.65,108.71 0 top
J115  WISECHIP_HUD_FPC  [SERIES6288]  123.19,88.39 0 top
J116  [1X04_1MM_RA]  156.72,97.28 90 top
J117  [1X04_1MM_RA]  141.48,97.28 270 top
J118  [1X01_NO_SILK]  144.02,108.71 0 top
J119  [1X04_NO_SILK]  146.56,108.71 0 top
J120  WISECHIP_HUD_FPC  [SERIES6288]  149.1,88.39 0 top
JP1  [SMT-JUMPER_3_2-NC_TRACE_SILK]  30.35,15.75 270 bottom
JP2  [SMT-JUMPER_3_2-NC_TRACE_SILK]  56.26,15.75 270 bottom
JP3  [SMT-JUMPER_3_2-NC_TRACE_SILK]  82.17,15.75 270 bottom
JP4  [SMT-JUMPER_3_2-NC_TRACE_SILK]  108.08,15.75 270 bottom
JP5  [SMT-JUMPER_3_2-NC_TRACE_SILK]  133.98,15.75 270 bottom
JP6  [SMT-JUMPER_3_2-NC_TRACE_SILK]  159.89,15.75 270 bottom
JP7  [SMT-JUMPER_3_2-NC_TRACE_SILK]  30.35,41.66 270 bottom
JP8  [SMT-JUMPER_3_2-NC_TRACE_SILK]  56.26,41.66 270 bottom
JP9  [SMT-JUMPER_3_2-NC_TRACE_SILK]  82.17,41.66 270 bottom
JP10  [SMT-JUMPER_3_2-NC_TRACE_SILK]  108.08,41.66 270 bottom
JP11  [SMT-JUMPER_3_2-NC_TRACE_SILK]  133.98,41.66 270 bottom
JP12  [SMT-JUMPER_3_2-NC_TRACE_SILK]  159.89,41.66 270 bottom
JP13  [SMT-JUMPER_3_2-NC_TRACE_SILK]  30.35,67.56 270 bottom
JP14  [SMT-JUMPER_3_2-NC_TRACE_SILK]  56.26,67.56 270 bottom
JP15  [SMT-JUMPER_3_2-NC_TRACE_SILK]  82.17,67.56 270 bottom
JP16  [SMT-JUMPER_3_2-NC_TRACE_SILK]  108.08,67.56 270 bottom
JP17  [SMT-JUMPER_3_2-NC_TRACE_SILK]  133.98,67.56 270 bottom
JP18  [SMT-JUMPER_3_2-NC_TRACE_SILK]  159.89,67.56 270 bottom
JP19  [SMT-JUMPER_3_2-NC_TRACE_SILK]  30.35,93.47 270 bottom
JP20  [SMT-JUMPER_3_2-NC_TRACE_SILK]  56.26,93.47 270 bottom
JP21  [SMT-JUMPER_3_2-NC_TRACE_SILK]  82.17,93.47 270 bottom
JP22  [SMT-JUMPER_3_2-NC_TRACE_SILK]  108.08,93.47 270 bottom
JP23  [SMT-JUMPER_3_2-NC_TRACE_SILK]  133.98,93.47 270 bottom
JP24  [SMT-JUMPER_3_2-NC_TRACE_SILK]  159.89,93.47 270 bottom
L1  10uH  [INDUCTOR_4.7UH]  24.64,24 90 top
L2  10uH  [INDUCTOR_4.7UH]  50.55,24 90 top
L3  10uH  [INDUCTOR_4.7UH]  76.45,24 90 top
L4  10uH  [INDUCTOR_4.7UH]  102.36,24 90 top
L5  10uH  [INDUCTOR_4.7UH]  128.27,24 90 top
L6  10uH  [INDUCTOR_4.7UH]  154.18,24 90 top
L7  10uH  [INDUCTOR_4.7UH]  24.64,49.91 90 top
L8  10uH  [INDUCTOR_4.7UH]  50.55,49.91 90 top
L9  10uH  [INDUCTOR_4.7UH]  76.45,49.91 90 top
L10  10uH  [INDUCTOR_4.7UH]  102.36,49.91 90 top
L11  10uH  [INDUCTOR_4.7UH]  128.27,49.91 90 top
L12  10uH  [INDUCTOR_4.7UH]  154.18,49.91 90 top
L13  10uH  [INDUCTOR_4.7UH]  24.64,75.82 90 top
L14  10uH  [INDUCTOR_4.7UH]  50.55,75.82 90 top
L15  10uH  [INDUCTOR_4.7UH]  76.45,75.82 90 top
L16  10uH  [INDUCTOR_4.7UH]  102.36,75.82 90 top
L17  10uH  [INDUCTOR_4.7UH]  128.27,75.82 90 top
L18  10uH  [INDUCTOR_4.7UH]  154.18,75.82 90 top
L19  10uH  [INDUCTOR_4.7UH]  24.64,101.73 90 top
L20  10uH  [INDUCTOR_4.7UH]  50.55,101.73 90 top
L21  10uH  [INDUCTOR_4.7UH]  76.45,101.73 90 top
L22  10uH  [INDUCTOR_4.7UH]  102.36,101.73 90 top
L23  10uH  [INDUCTOR_4.7UH]  128.27,101.73 90 top
L24  10uH  [INDUCTOR_4.7UH]  154.18,101.73 90 top
LOGO1  OSHW-LOGOS  [OSHW-LOGO-S]  19.56,9.4 0 bottom
LOGO2  SFE_LOGO_NAME_FLAME.1_INCH  [SFE_LOGO_NAME_FLAME_.1]  19.43,20.07 0 bottom
LOGO3  SFE_LOGO_FLAME.1_INCH  [SFE_LOGO_FLAME_.1]  12.83,10.03 0 top
LOGO4  SFE_LOGO_NAME_FLAME.1_INCH  [SFE_LOGO_NAME_FLAME_.1]  45.34,20.07 0 bottom
LOGO5  SFE_LOGO_FLAME.1_INCH  [SFE_LOGO_FLAME_.1]  38.73,10.03 0 top
LOGO6  OSHW-LOGOS  [OSHW-LOGO-S]  45.47,9.4 0 bottom
LOGO7  SFE_LOGO_NAME_FLAME.1_INCH  [SFE_LOGO_NAME_FLAME_.1]  71.25,20.07 0 bottom
LOGO8  SFE_LOGO_FLAME.1_INCH  [SFE_LOGO_FLAME_.1]  64.64,10.03 0 top
LOGO9  OSHW-LOGOS  [OSHW-LOGO-S]  71.37,9.4 0 bottom
LOGO10  SFE_LOGO_NAME_FLAME.1_INCH  [SFE_LOGO_NAME_FLAME_.1]  97.16,20.07 0 bottom
LOGO11  SFE_LOGO_FLAME.1_INCH  [SFE_LOGO_FLAME_.1]  90.55,10.03 0 top
LOGO12  OSHW-LOGOS  [OSHW-LOGO-S]  97.28,9.4 0 bottom
LOGO13  SFE_LOGO_NAME_FLAME.1_INCH  [SFE_LOGO_NAME_FLAME_.1]  123.06,20.07 0 bottom
LOGO14  SFE_LOGO_FLAME.1_INCH  [SFE_LOGO_FLAME_.1]  116.46,10.03 0 top
LOGO15  OSHW-LOGOS  [OSHW-LOGO-S]  123.19,9.4 0 bottom
LOGO16  SFE_LOGO_NAME_FLAME.1_INCH  [SFE_LOGO_NAME_FLAME_.1]  148.97,20.07 0 bottom
LOGO17  SFE_LOGO_FLAME.1_INCH  [SFE_LOGO_FLAME_.1]  142.37,10.03 0 top
LOGO18  OSHW-LOGOS  [OSHW-LOGO-S]  149.1,9.4 0 bottom
LOGO19  SFE_LOGO_NAME_FLAME.1_INCH  [SFE_LOGO_NAME_FLAME_.1]  19.43,45.97 0 bottom
LOGO20  SFE_LOGO_FLAME.1_INCH  [SFE_LOGO_FLAME_.1]  12.83,35.94 0 top
LOGO21  OSHW-LOGOS  [OSHW-LOGO-S]  19.56,35.31 0 bottom
LOGO22  SFE_LOGO_NAME_FLAME.1_INCH  [SFE_LOGO_NAME_FLAME_.1]  45.34,45.97 0 bottom
LOGO23  SFE_LOGO_FLAME.1_INCH  [SFE_LOGO_FLAME_.1]  38.73,35.94 0 top
LOGO24  OSHW-LOGOS  [OSHW-LOGO-S]  45.47,35.31 0 bottom
LOGO25  SFE_LOGO_NAME_FLAME.1_INCH  [SFE_LOGO_NAME_FLAME_.1]  71.25,45.97 0 bottom
LOGO26  SFE_LOGO_FLAME.1_INCH  [SFE_LOGO_FLAME_.1]  64.64,35.94 0 top
LOGO27  OSHW-LOGOS  [OSHW-LOGO-S]  71.37,35.31 0 bottom
LOGO28  SFE_LOGO_NAME_FLAME.1_INCH  [SFE_LOGO_NAME_FLAME_.1]  97.16,45.97 0 bottom
LOGO29  SFE_LOGO_FLAME.1_INCH  [SFE_LOGO_FLAME_.1]  90.55,35.94 0 top
LOGO30  OSHW-LOGOS  [OSHW-LOGO-S]  97.28,35.31 0 bottom
LOGO31  SFE_LOGO_NAME_FLAME.1_INCH  [SFE_LOGO_NAME_FLAME_.1]  123.06,45.97 0 bottom
LOGO32  SFE_LOGO_FLAME.1_INCH  [SFE_LOGO_FLAME_.1]  116.46,35.94 0 top
LOGO33  OSHW-LOGOS  [OSHW-LOGO-S]  123.19,35.31 0 bottom
LOGO34  SFE_LOGO_NAME_FLAME.1_INCH  [SFE_LOGO_NAME_FLAME_.1]  148.97,45.97 0 bottom
LOGO35  SFE_LOGO_FLAME.1_INCH  [SFE_LOGO_FLAME_.1]  142.37,35.94 0 top
LOGO36  OSHW-LOGOS  [OSHW-LOGO-S]  149.1,35.31 0 bottom
LOGO37  SFE_LOGO_NAME_FLAME.1_INCH  [SFE_LOGO_NAME_FLAME_.1]  19.43,71.88 0 bottom
LOGO38  SFE_LOGO_FLAME.1_INCH  [SFE_LOGO_FLAME_.1]  12.83,61.85 0 top
LOGO39  OSHW-LOGOS  [OSHW-LOGO-S]  19.56,61.21 0 bottom
LOGO40  SFE_LOGO_NAME_FLAME.1_INCH  [SFE_LOGO_NAME_FLAME_.1]  45.34,71.88 0 bottom
LOGO41  SFE_LOGO_FLAME.1_INCH  [SFE_LOGO_FLAME_.1]  38.73,61.85 0 top
LOGO42  OSHW-LOGOS  [OSHW-LOGO-S]  45.47,61.21 0 bottom
LOGO43  SFE_LOGO_NAME_FLAME.1_INCH  [SFE_LOGO_NAME_FLAME_.1]  71.25,71.88 0 bottom
LOGO44  SFE_LOGO_FLAME.1_INCH  [SFE_LOGO_FLAME_.1]  64.64,61.85 0 top
LOGO45  OSHW-LOGOS  [OSHW-LOGO-S]  71.37,61.21 0 bottom
LOGO46  SFE_LOGO_NAME_FLAME.1_INCH  [SFE_LOGO_NAME_FLAME_.1]  97.16,71.88 0 bottom
LOGO47  SFE_LOGO_FLAME.1_INCH  [SFE_LOGO_FLAME_.1]  90.55,61.85 0 top
LOGO48  OSHW-LOGOS  [OSHW-LOGO-S]  97.28,61.21 0 bottom
LOGO49  SFE_LOGO_NAME_FLAME.1_INCH  [SFE_LOGO_NAME_FLAME_.1]  123.06,71.88 0 bottom
LOGO50  SFE_LOGO_FLAME.1_INCH  [SFE_LOGO_FLAME_.1]  116.46,61.85 0 top
LOGO51  OSHW-LOGOS  [OSHW-LOGO-S]  123.19,61.21 0 bottom
LOGO52  SFE_LOGO_NAME_FLAME.1_INCH  [SFE_LOGO_NAME_FLAME_.1]  148.97,71.88 0 bottom
LOGO53  SFE_LOGO_FLAME.1_INCH  [SFE_LOGO_FLAME_.1]  142.37,61.85 0 top
LOGO54  OSHW-LOGOS  [OSHW-LOGO-S]  149.1,61.21 0 bottom
LOGO55  SFE_LOGO_NAME_FLAME.1_INCH  [SFE_LOGO_NAME_FLAME_.1]  19.43,97.79 0 bottom
LOGO56  SFE_LOGO_FLAME.1_INCH  [SFE_LOGO_FLAME_.1]  12.83,87.76 0 top
LOGO57  OSHW-LOGOS  [OSHW-LOGO-S]  19.56,87.12 0 bottom
LOGO58  SFE_LOGO_NAME_FLAME.1_INCH  [SFE_LOGO_NAME_FLAME_.1]  45.34,97.79 0 bottom
LOGO59  SFE_LOGO_FLAME.1_INCH  [SFE_LOGO_FLAME_.1]  38.73,87.76 0 top
LOGO60  OSHW-LOGOS  [OSHW-LOGO-S]  45.47,87.12 0 bottom
LOGO61  SFE_LOGO_NAME_FLAME.1_INCH  [SFE_LOGO_NAME_FLAME_.1]  71.25,97.79 0 bottom
LOGO62  SFE_LOGO_FLAME.1_INCH  [SFE_LOGO_FLAME_.1]  64.64,87.76 0 top
LOGO63  OSHW-LOGOS  [OSHW-LOGO-S]  71.37,87.12 0 bottom
LOGO64  SFE_LOGO_NAME_FLAME.1_INCH  [SFE_LOGO_NAME_FLAME_.1]  97.16,97.79 0 bottom
LOGO65  SFE_LOGO_FLAME.1_INCH  [SFE_LOGO_FLAME_.1]  90.55,87.76 0 top
LOGO66  OSHW-LOGOS  [OSHW-LOGO-S]  97.28,87.12 0 bottom
LOGO67  SFE_LOGO_NAME_FLAME.1_INCH  [SFE_LOGO_NAME_FLAME_.1]  123.06,97.79 0 bottom
LOGO68  SFE_LOGO_FLAME.1_INCH  [SFE_LOGO_FLAME_.1]  116.46,87.76 0 top
LOGO69  OSHW-LOGOS  [OSHW-LOGO-S]  123.19,87.12 0 bottom
LOGO70  SFE_LOGO_NAME_FLAME.1_INCH  [SFE_LOGO_NAME_FLAME_.1]  148.97,97.79 0 bottom
LOGO71  SFE_LOGO_FLAME.1_INCH  [SFE_LOGO_FLAME_.1]  142.37,87.76 0 top
LOGO72  OSHW-LOGOS  [OSHW-LOGO-S]  149.1,87.12 0 bottom
R1  10k  [0603]  17.02,16.38 0 top
R2  2.2k  [0603]  25.91,12.57 180 top
R3  10k  [0603]  42.93,16.38 0 top
R4  2.2k  [0603]  29.72,14.48 180 top
R5  1k  [0603]  8.06,25.26 90 top
R6  47k  [0603]  14.48,24 180 top
R7  5.6k  [0603]  14.48,25.91 0 top
R8  2.2k  [0603]  51.82,12.57 180 top
R9  2.2k  [0603]  55.63,14.48 180 top
R10  1k  [0603]  33.97,25.26 90 top
R11  47k  [0603]  40.39,24 180 top
R12  5.6k  [0603]  40.39,25.91 0 top
R13  10k  [0603]  68.83,16.38 0 top
R14  2.2k  [0603]  77.72,12.57 180 top
R15  2.2k  [0603]  81.53,14.48 180 top
R16  1k  [0603]  59.87,25.26 90 top
R17  47k  [0603]  66.29,24 180 top
R18  5.6k  [0603]  66.29,25.91 0 top
R19  10k  [0603]  94.74,16.38 0 top
R20  2.2k  [0603]  103.63,12.57 180 top
R21  2.2k  [0603]  107.44,14.48 180 top
R22  1k  [0603]  85.78,25.26 90 top
R23  47k  [0603]  92.2,24 180 top
R24  5.6k  [0603]  92.2,25.91 0 top
R25  10k  [0603]  120.65,16.38 0 top
R26  2.2k  [0603]  129.54,12.57 180 top
R27  2.2k  [0603]  133.35,14.48 180 top
R28  1k  [0603]  111.69,25.26 90 top
R29  47k  [0603]  118.11,24 180 top
R30  5.6k  [0603]  118.11,25.91 0 top
R31  10k  [0603]  146.56,16.38 0 top
R32  2.2k  [0603]  155.45,12.57 180 top
R33  2.2k  [0603]  159.26,14.48 180 top
R34  1k  [0603]  137.6,25.26 90 top
R35  47k  [0603]  144.02,24 180 top
R36  5.6k  [0603]  144.02,25.91 0 top
R37  10k  [0603]  17.02,42.29 0 top
R38  2.2k  [0603]  25.91,38.48 180 top
R39  2.2k  [0603]  29.72,40.39 180 top
R40  1k  [0603]  8.06,51.17 90 top
R41  47k  [0603]  14.48,49.91 180 top
R42  5.6k  [0603]  14.48,51.82 0 top
R43  10k  [0603]  42.93,42.29 0 top
R44  2.2k  [0603]  51.82,38.48 180 top
R45  2.2k  [0603]  55.63,40.39 180 top
R46  1k  [0603]  33.97,51.17 90 top
R47  47k  [0603]  40.39,49.91 180 top
R48  5.6k  [0603]  40.39,51.82 0 top
R49  10k  [0603]  68.83,42.29 0 top
R50  2.2k  [0603]  77.72,38.48 180 top
R51  2.2k  [0603]  81.53,40.39 180 top
R52  1k  [0603]  59.87,51.17 90 top
R53  47k  [0603]  66.29,49.91 180 top
R54  5.6k  [0603]  66.29,51.82 0 top
R55  10k  [0603]  94.74,42.29 0 top
R56  2.2k  [0603]  103.63,38.48 180 top
R57  2.2k  [0603]  107.44,40.39 180 top
R58  1k  [0603]  85.78,51.17 90 top
R59  47k  [0603]  92.2,49.91 180 top
R60  5.6k  [0603]  92.2,51.82 0 top
R61  10k  [0603]  120.65,42.29 0 top
R62  2.2k  [0603]  129.54,38.48 180 top
R63  2.2k  [0603]  133.35,40.39 180 top
R64  1k  [0603]  111.69,51.17 90 top
R65  47k  [0603]  118.11,49.91 180 top
R66  5.6k  [0603]  118.11,51.82 0 top
R67  10k  [0603]  146.56,42.29 0 top
R68  2.2k  [0603]  155.45,38.48 180 top
R69  2.2k  [0603]  159.26,40.39 180 top
R70  1k  [0603]  137.6,51.17 90 top
R71  47k  [0603]  144.02,49.91 180 top
R72  5.6k  [0603]  144.02,51.82 0 top
R73  10k  [0603]  17.02,68.2 0 top
R74  2.2k  [0603]  25.91,64.39 180 top
R75  2.2k  [0603]  29.72,66.29 180 top
R76  1k  [0603]  8.06,77.07 90 top
R77  47k  [0603]  14.48,75.82 180 top
R78  5.6k  [0603]  14.48,77.72 0 top
R79  10k  [0603]  42.93,68.2 0 top
R80  2.2k  [0603]  51.82,64.39 180 top
R81  2.2k  [0603]  55.63,66.29 180 top
R82  1k  [0603]  33.97,77.07 90 top
R83  47k  [0603]  40.39,75.82 180 top
R84  5.6k  [0603]  40.39,77.72 0 top
R85  10k  [0603]  68.83,68.2 0 top
R86  2.2k  [0603]  77.72,64.39 180 top
R87  2.2k  [0603]  81.53,66.29 180 top
R88  1k  [0603]  59.87,77.07 90 top
R89  47k  [0603]  66.29,75.82 180 top
R90  5.6k  [0603]  66.29,77.72 0 top
R91  10k  [0603]  94.74,68.2 0 top
R92  2.2k  [0603]  103.63,64.39 180 top
R93  2.2k  [0603]  107.44,66.29 180 top
R94  1k  [0603]  85.78,77.07 90 top
R95  47k  [0603]  92.2,75.82 180 top
R96  5.6k  [0603]  92.2,77.72 0 top
R97  10k  [0603]  120.65,68.2 0 top
R98  2.2k  [0603]  129.54,64.39 180 top
R99  2.2k  [0603]  133.35,66.29 180 top
R100  1k  [0603]  111.69,77.07 90 top
R101  47k  [0603]  118.11,75.82 180 top
R102  5.6k  [0603]  118.11,77.72 0 top
R103  10k  [0603]  146.56,68.2 0 top
R104  2.2k  [0603]  155.45,64.39 180 top
R105  2.2k  [0603]  159.26,66.29 180 top
R106  1k  [0603]  137.6,77.07 90 top
R107  47k  [0603]  144.02,75.82 180 top
R108  5.6k  [0603]  144.02,77.72 0 top
R109  10k  [0603]  17.02,94.11 0 top
R110  2.2k  [0603]  25.91,90.3 180 top
R111  2.2k  [0603]  29.72,92.2 180 top
R112  1k  [0603]  8.06,102.98 90 top
R113  47k  [0603]  14.48,101.73 180 top
R114  5.6k  [0603]  14.48,103.63 0 top
R115  10k  [0603]  42.93,94.11 0 top
R116  2.2k  [0603]  51.82,90.3 180 top
R117  2.2k  [0603]  55.63,92.2 180 top
R118  1k  [0603]  33.97,102.98 90 top
R119  47k  [0603]  40.39,101.73 180 top
R120  5.6k  [0603]  40.39,103.63 0 top
R121  10k  [0603]  68.83,94.11 0 top
R122  2.2k  [0603]  77.72,90.3 180 top
R123  2.2k  [0603]  81.53,92.2 180 top
R124  1k  [0603]  59.87,102.98 90 top
R125  47k  [0603]  66.29,101.73 180 top
R126  5.6k  [0603]  66.29,103.63 0 top
R127  10k  [0603]  94.74,94.11 0 top
R128  2.2k  [0603]  103.63,90.3 180 top
R129  2.2k  [0603]  107.44,92.2 180 top
R130  1k  [0603]  85.78,102.98 90 top
R131  47k  [0603]  92.2,101.73 180 top
R132  5.6k  [0603]  92.2,103.63 0 top
R133  10k  [0603]  120.65,94.11 0 top
R134  2.2k  [0603]  129.54,90.3 180 top
R135  2.2k  [0603]  133.35,92.2 180 top
R136  1k  [0603]  111.69,102.98 90 top
R137  47k  [0603]  118.11,101.73 180 top
R138  5.6k  [0603]  118.11,103.63 0 top
R139  10k  [0603]  146.56,94.11 0 top
R140  2.2k  [0603]  155.45,90.3 180 top
R141  2.2k  [0603]  159.26,92.2 180 top
R142  1k  [0603]  137.6,102.98 90 top
R143  47k  [0603]  144.02,101.73 180 top
R144  5.6k  [0603]  144.02,103.63 0 top
U1  AP3012  [SOT23-5]  19.56,24 180 top
U2  AP3012  [SOT23-5]  45.47,24 180 top
U3  AP3012  [SOT23-5]  71.37,24 180 top
U4  AP3012  [SOT23-5]  97.28,24 180 top
U5  AP3012  [SOT23-5]  123.19,24 180 top
U6  AP3012  [SOT23-5]  149.1,24 180 top
U7  AP3012  [SOT23-5]  19.56,49.91 180 top
U8  AP3012  [SOT23-5]  45.47,49.91 180 top
U9  AP3012  [SOT23-5]  71.37,49.91 180 top
U10  AP3012  [SOT23-5]  97.28,49.91 180 top
U11  AP3012  [SOT23-5]  123.19,49.91 180 top
U12  AP3012  [SOT23-5]  149.1,49.91 180 top
U13  AP3012  [SOT23-5]  19.56,75.82 180 top
U14  AP3012  [SOT23-5]  45.47,75.82 180 top
U15  AP3012  [SOT23-5]  71.37,75.82 180 top
U16  AP3012  [SOT23-5]  97.28,75.82 180 top
U17  AP3012  [SOT23-5]  123.19,75.82 180 top
U18  AP3012  [SOT23-5]  149.1,75.82 180 top
U19  AP3012  [SOT23-5]  19.56,101.73 180 top
U20  AP3012  [SOT23-5]  45.47,101.73 180 top
U21  AP3012  [SOT23-5]  71.37,101.73 180 top
U22  AP3012  [SOT23-5]  97.28,101.73 180 top
U23  AP3012  [SOT23-5]  123.19,101.73 180 top
U24  AP3012  [SOT23-5]  149.1,101.73 180 top
U$1  [#RST>]  14.48,30.86 270 top
U$2  [QWIIC0]  26.42,26.04 0 top
U$3  [HUD1]  26.92,24.77 0 top
U$4  [#RST>]  40.39,30.86 270 top
U$5  [GND]  17.02,30.73 270 top
U$6  [3V3]  19.56,30.73 270 top
U$7  [SDA]  22.1,30.73 270 top
U$8  [SCL]  24.64,30.73 270 top
U$9  [(PWR)]  11.18,27.69 270 top
U$10  [SDA]  22.1,30.73 270 bottom
U$11  [SCL]  24.64,30.73 270 bottom
U$12  [3V3]  19.56,30.73 270 bottom
U$13  [GND]  17.02,30.73 270 bottom
U$14  [#RST>]  14.48,30.86 270 bottom
U$15  [GND]  42.93,30.73 270 top
U$16  [3V3]  45.47,30.73 270 top
U$17  [SDA]  48.01,30.73 270 top
U$18  [QWIIC0]  23.88,18.29 0 bottom
U$19  [HUD1]  19.43,18.29 0 bottom
U$20  [(I_SUPER2_C)]  27.69,17.53 270 bottom
U$21  [SCL]  50.55,30.73 270 top
U$22  [(PWR)]  37.08,27.69 270 top
U$23  [SDA]  48.01,30.73 270 bottom
U$24  [SCL]  50.55,30.73 270 bottom
U$25  [3V3]  45.47,30.73 270 bottom
U$26  [GND]  42.93,30.73 270 bottom
U$27  [#RST>]  40.39,30.86 270 bottom
U$28  [QWIIC0]  49.78,18.29 0 bottom
U$29  [HUD1]  45.34,18.29 0 bottom
U$30  [(I_SUPER2_C)]  53.59,17.53 270 bottom
U$31  [QWIIC0]  52.32,26.04 0 top
U$32  [HUD1]  52.83,24.77 0 top
U$33  [#RST>]  66.29,30.86 270 top
U$34  [GND]  68.83,30.73 270 top
U$35  [3V3]  71.37,30.73 270 top
U$36  [SDA]  73.91,30.73 270 top
U$37  [SCL]  76.45,30.73 270 top
U$38  [(PWR)]  62.99,27.69 270 top
U$39  [SDA]  73.91,30.73 270 bottom
U$40  [SCL]  76.45,30.73 270 bottom
U$41  [3V3]  71.37,30.73 270 bottom
U$42  [GND]  68.83,30.73 270 bottom
U$43  [#RST>]  66.29,30.86 270 bottom
U$44  [QWIIC0]  75.69,18.29 0 bottom
U$45  [HUD1]  71.25,18.29 0 bottom
U$46  [(I_SUPER2_C)]  79.5,17.53 270 bottom
U$47  [QWIIC0]  78.23,26.04 0 top
U$48  [HUD1]  78.74,24.77 0 top
U$49  [#RST>]  92.2,30.86 270 top
U$50  [GND]  94.74,30.73 270 top
U$51  [3V3]  97.28,30.73 270 top
U$52  [SDA]  99.82,30.73 270 top
U$53  [SCL]  102.36,30.73 270 top
U$54  [(PWR)]  88.9,27.69 270 top
U$55  [SDA]  99.82,30.73 270 bottom
U$56  [SCL]  102.36,30.73 270 bottom
U$57  [3V3]  97.28,30.73 270 bottom
U$58  [GND]  94.74,30.73 270 bottom
U$59  [#RST>]  92.2,30.86 270 bottom
U$60  [QWIIC0]  101.6,18.29 0 bottom
U$61  [HUD1]  97.16,18.29 0 bottom
U$62  [(I_SUPER2_C)]  105.41,17.53 270 bottom
U$63  [QWIIC0]  104.14,26.04 0 top
U$64  [HUD1]  104.65,24.77 0 top
U$65  [#RST>]  118.11,30.86 270 top
U$66  [GND]  120.65,30.73 270 top
U$67  [3V3]  123.19,30.73 270 top
U$68  [SDA]  125.73,30.73 270 top
U$69  [SCL]  128.27,30.73 270 top
U$70  [(PWR)]  114.81,27.69 270 top
U$71  [SDA]  125.73,30.73 270 bottom
U$72  [SCL]  128.27,30.73 270 bottom
U$73  [3V3]  123.19,30.73 270 bottom
U$74  [GND]  120.65,30.73 270 bottom
U$75  [#RST>]  118.11,30.86 270 bottom
U$76  [QWIIC0]  127.51,18.29 0 bottom
U$77  [HUD1]  123.06,18.29 0 bottom
U$78  [(I_SUPER2_C)]  131.32,17.53 270 bottom
U$79  [QWIIC0]  130.05,26.04 0 top
U$80  [HUD1]  130.56,24.77 0 top
U$81  [#RST>]  144.02,30.86 270 top
U$82  [GND]  146.56,30.73 270 top
U$83  [3V3]  149.1,30.73 270 top
U$84  [SDA]  151.64,30.73 270 top
U$85  [SCL]  154.18,30.73 270 top
U$86  [(PWR)]  140.72,27.69 270 top
U$87  [SDA]  151.64,30.73 270 bottom
U$88  [SCL]  154.18,30.73 270 bottom
U$89  [3V3]  149.1,30.73 270 bottom
U$90  [GND]  146.56,30.73 270 bottom
U$91  [#RST>]  144.02,30.86 270 bottom
U$92  [QWIIC0]  153.42,18.29 0 bottom
U$93  [HUD1]  148.97,18.29 0 bottom
U$94  [(I_SUPER2_C)]  157.23,17.53 270 bottom
U$95  [QWIIC0]  155.96,26.04 0 top
U$96  [HUD1]  156.46,24.77 0 top
U$97  [#RST>]  14.48,56.77 270 top
U$98  [GND]  17.02,56.64 270 top
U$99  [3V3]  19.56,56.64 270 top
U$100  [SDA]  22.1,56.64 270 top
U$101  [SCL]  24.64,56.64 270 top
U$102  [(PWR)]  11.18,53.59 270 top
U$103  [SDA]  22.1,56.64 270 bottom
U$104  [SCL]  24.64,56.64 270 bottom
U$105  [3V3]  19.56,56.64 270 bottom
U$106  [GND]  17.02,56.64 270 bottom
U$107  [#RST>]  14.48,56.77 270 bottom
U$108  [QWIIC0]  23.88,44.2 0 bottom
U$109  [HUD1]  19.43,44.2 0 bottom
U$110  [(I_SUPER2_C)]  27.69,43.43 270 bottom
U$111  [QWIIC0]  26.42,51.94 0 top
U$112  [HUD1]  26.92,50.67 0 top
U$113  [#RST>]  40.39,56.77 270 top
U$114  [GND]  42.93,56.64 270 top
U$115  [3V3]  45.47,56.64 270 top
U$116  [SDA]  48.01,56.64 270 top
U$117  [SCL]  50.55,56.64 270 top
U$118  [(PWR)]  37.08,53.59 270 top
U$119  [SDA]  48.01,56.64 270 bottom
U$120  [SCL]  50.55,56.64 270 bottom
U$121  [3V3]  45.47,56.64 270 bottom
U$122  [GND]  42.93,56.64 270 bottom
U$123  [#RST>]  40.39,56.77 270 bottom
U$124  [QWIIC0]  49.78,44.2 0 bottom
U$125  [HUD1]  45.34,44.2 0 bottom
U$126  [(I_SUPER2_C)]  53.59,43.43 270 bottom
U$127  [QWIIC0]  52.32,51.94 0 top
U$128  [HUD1]  52.83,50.67 0 top
U$129  [#RST>]  66.29,56.77 270 top
U$130  [GND]  68.83,56.64 270 top
U$131  [3V3]  71.37,56.64 270 top
U$132  [SDA]  73.91,56.64 270 top
U$133  [SCL]  76.45,56.64 270 top
U$134  [(PWR)]  62.99,53.59 270 top
U$135  [SDA]  73.91,56.64 270 bottom
U$136  [SCL]  76.45,56.64 270 bottom
U$137  [3V3]  71.37,56.64 270 bottom
U$138  [GND]  68.83,56.64 270 bottom
U$139  [#RST>]  66.29,56.77 270 bottom
U$140  [QWIIC0]  75.69,44.2 0 bottom
U$141  [HUD1]  71.25,44.2 0 bottom
U$142  [(I_SUPER2_C)]  79.5,43.43 270 bottom
U$143  [QWIIC0]  78.23,51.94 0 top
U$144  [HUD1]  78.74,50.67 0 top
U$145  [#RST>]  92.2,56.77 270 top
U$146  [GND]  94.74,56.64 270 top
U$147  [3V3]  97.28,56.64 270 top
U$148  [SDA]  99.82,56.64 270 top
U$149  [SCL]  102.36,56.64 270 top
U$150  [(PWR)]  88.9,53.59 270 top
U$151  [SDA]  99.82,56.64 270 bottom
U$152  [SCL]  102.36,56.64 270 bottom
U$153  [3V3]  97.28,56.64 270 bottom
U$154  [GND]  94.74,56.64 270 bottom
U$155  [#RST>]  92.2,56.77 270 bottom
U$156  [QWIIC0]  101.6,44.2 0 bottom
U$157  [HUD1]  97.16,44.2 0 bottom
U$158  [(I_SUPER2_C)]  105.41,43.43 270 bottom
U$159  [QWIIC0]  104.14,51.94 0 top
U$160  [HUD1]  104.65,50.67 0 top
U$161  [#RST>]  118.11,56.77 270 top
U$162  [GND]  120.65,56.64 270 top
U$163  [3V3]  123.19,56.64 270 top
U$164  [SDA]  125.73,56.64 270 top
U$165  [SCL]  128.27,56.64 270 top
U$166  [(PWR)]  114.81,53.59 270 top
U$167  [SDA]  125.73,56.64 270 bottom
U$168  [SCL]  128.27,56.64 270 bottom
U$169  [3V3]  123.19,56.64 270 bottom
U$170  [GND]  120.65,56.64 270 bottom
U$171  [#RST>]  118.11,56.77 270 bottom
U$172  [QWIIC0]  127.51,44.2 0 bottom
U$173  [HUD1]  123.06,44.2 0 bottom
U$174  [(I_SUPER2_C)]  131.32,43.43 270 bottom
U$175  [QWIIC0]  130.05,51.94 0 top
U$176  [HUD1]  130.56,50.67 0 top
U$177  [#RST>]  144.02,56.77 270 top
U$178  [GND]  146.56,56.64 270 top